# Altium PCB SMU_V2.03.PcbDoc (part 1 of 2)
Units mil, origin at the board's own origin, x right, y up, seen from the top; angles counter-clockwise.
Board outline 8661.42 x 7437.01 mil, 4 copper layers (Component Side, Ground Plane, Power Plane, Solder Side), stack 33.234 mil thick; 228 components, 152 nets, 762 pads, 943 vias.
Unrouted connection lines stored in the file: 21.
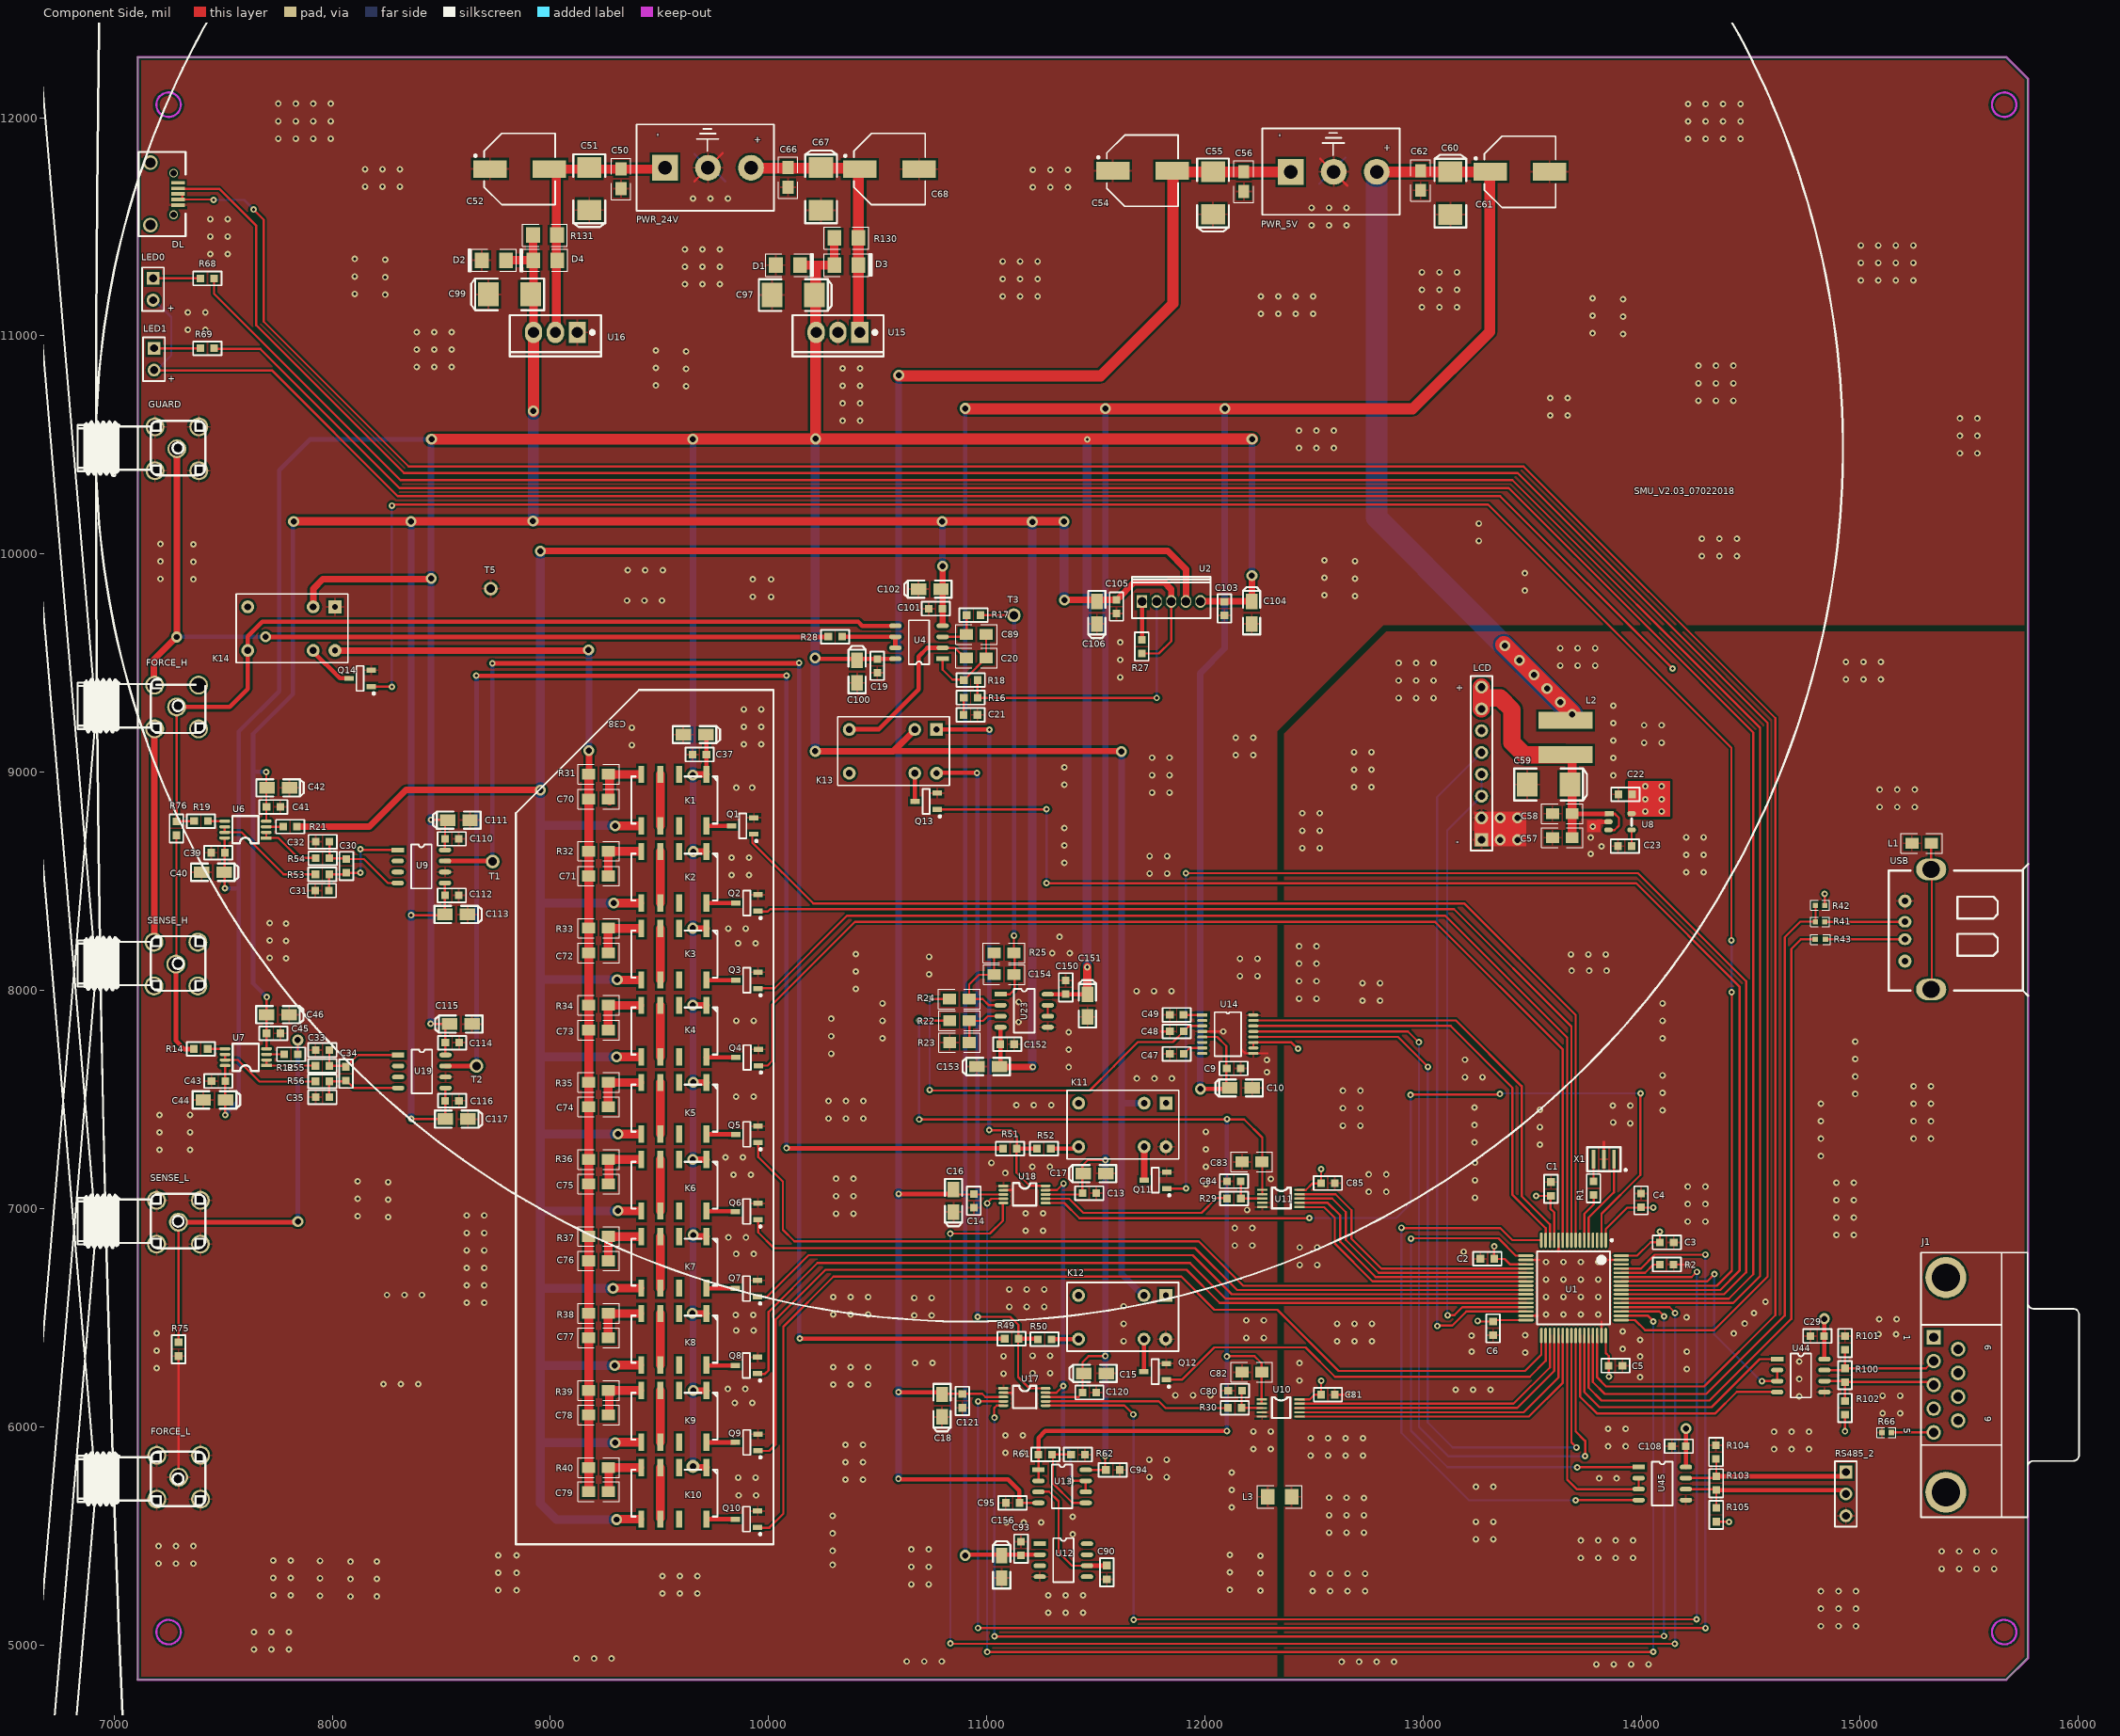
[diagram p0: Component Side view]
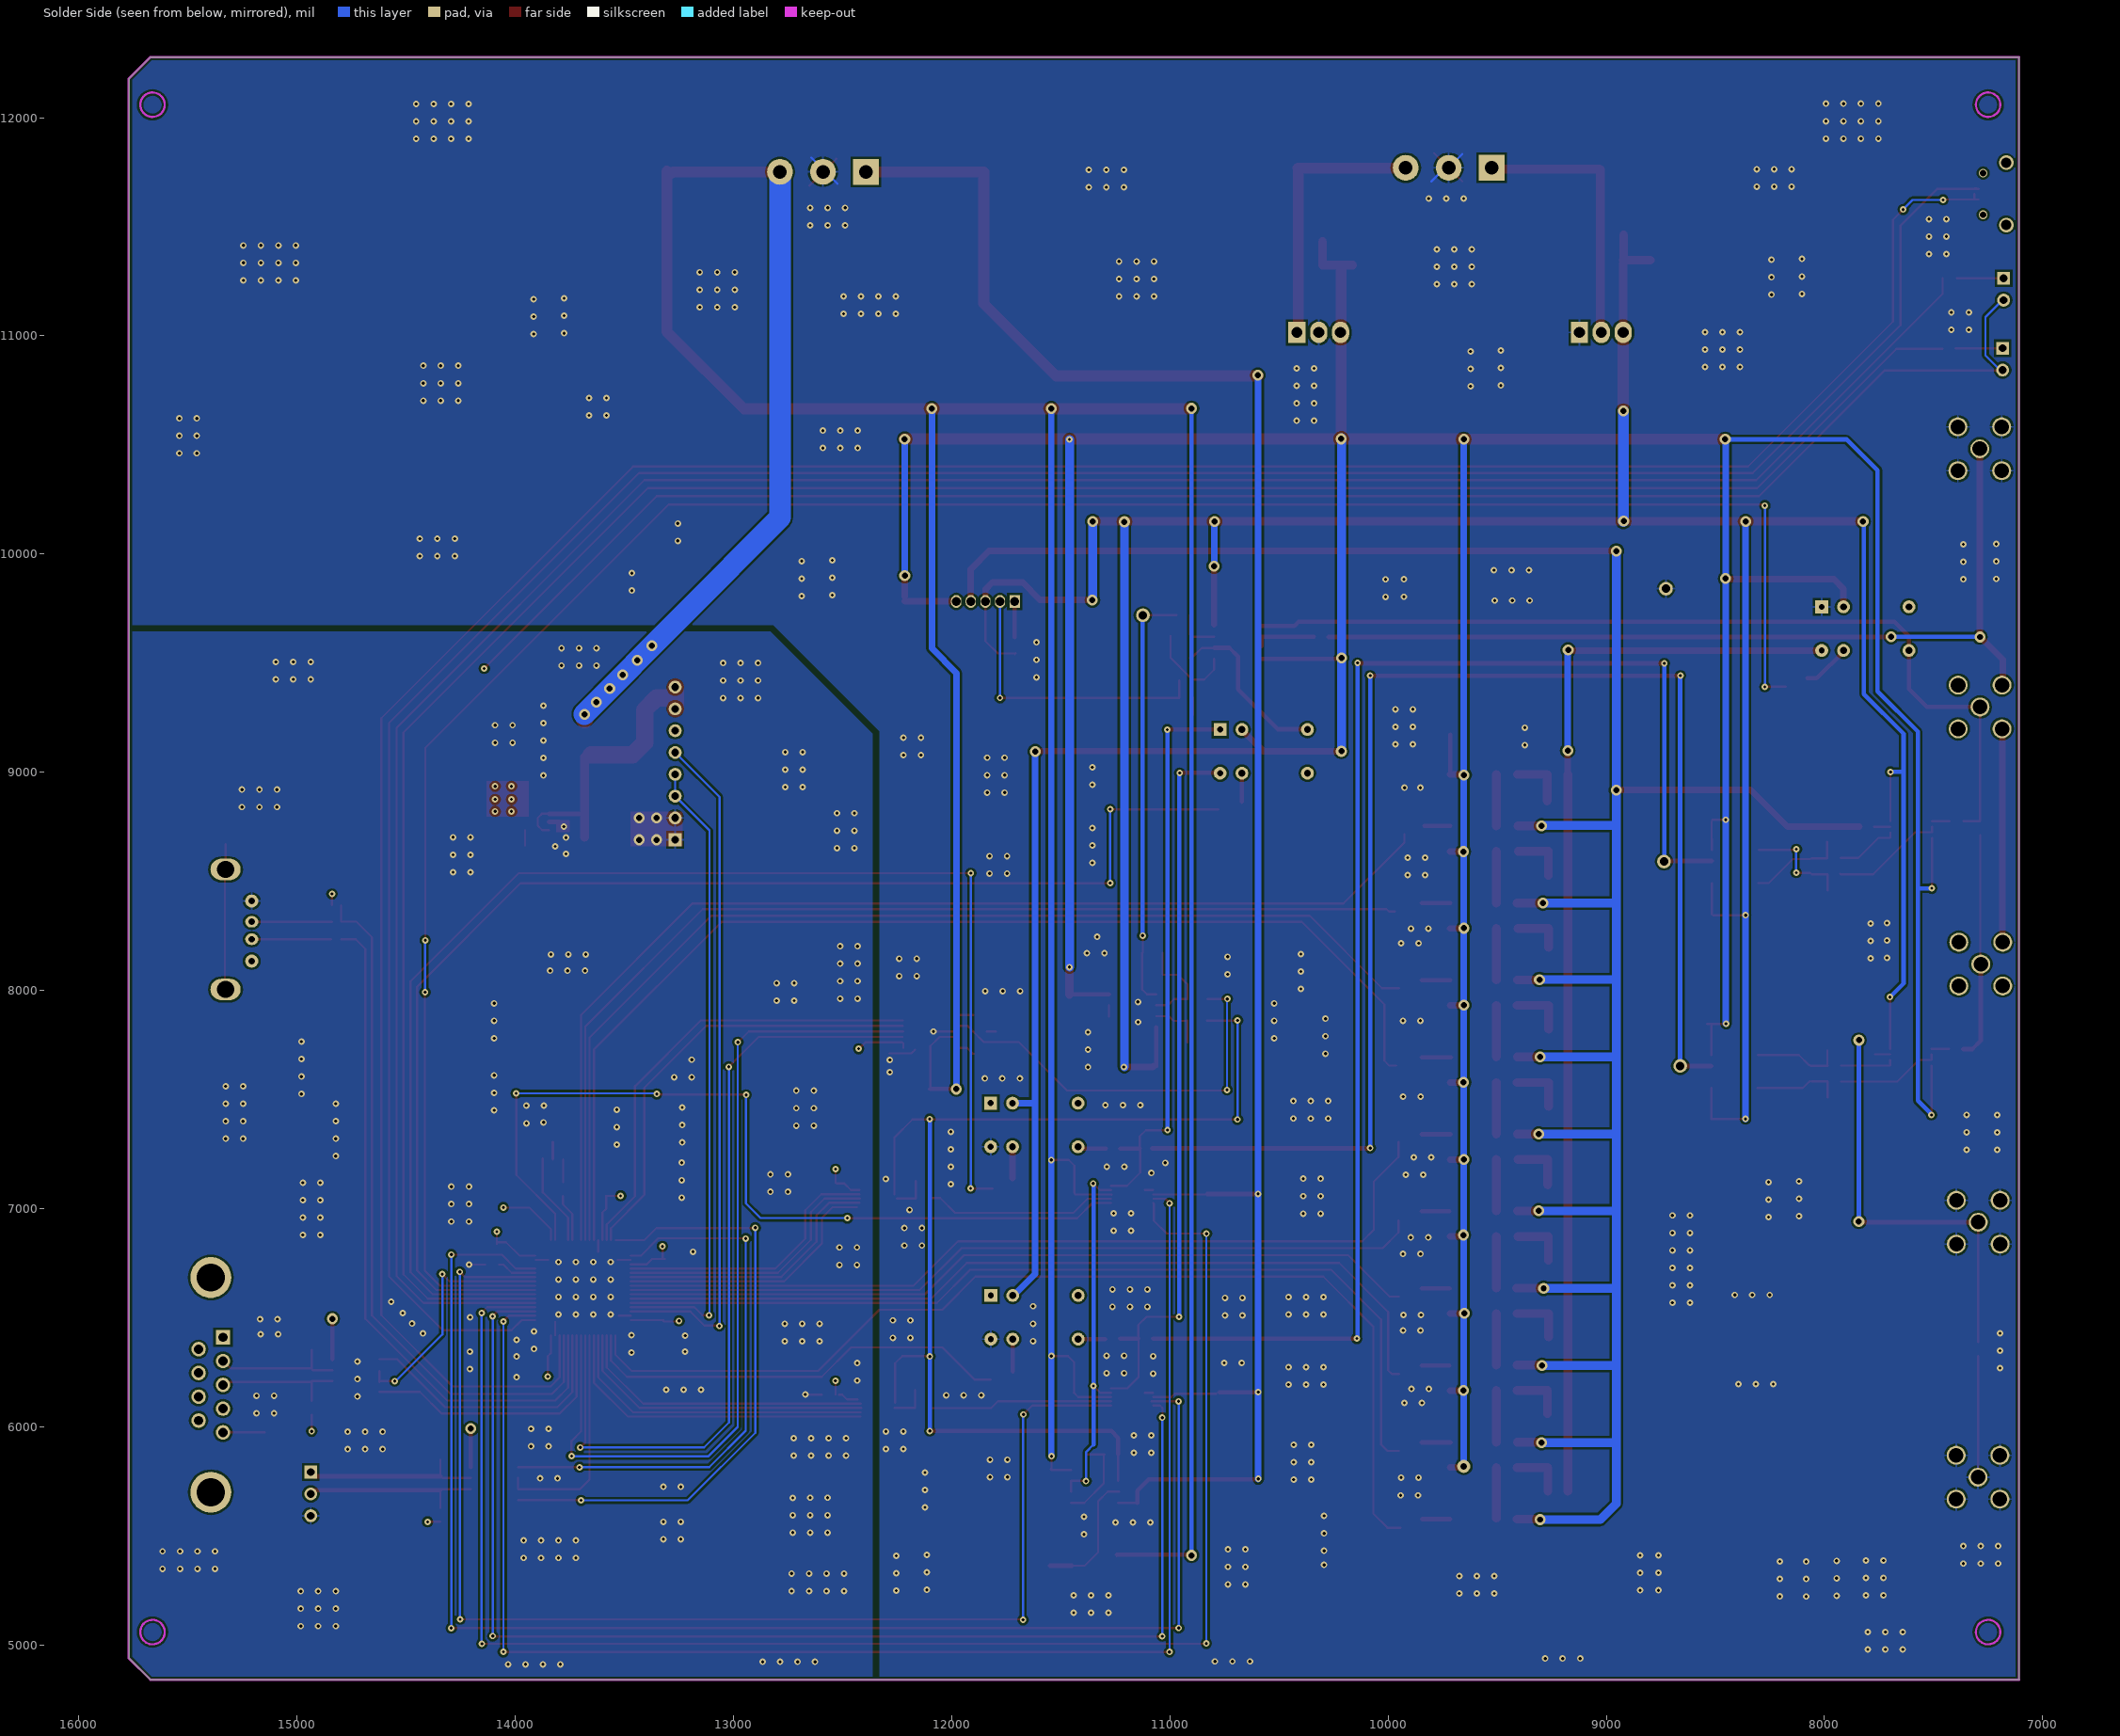
[diagram p1: Solder Side view, seen from below]
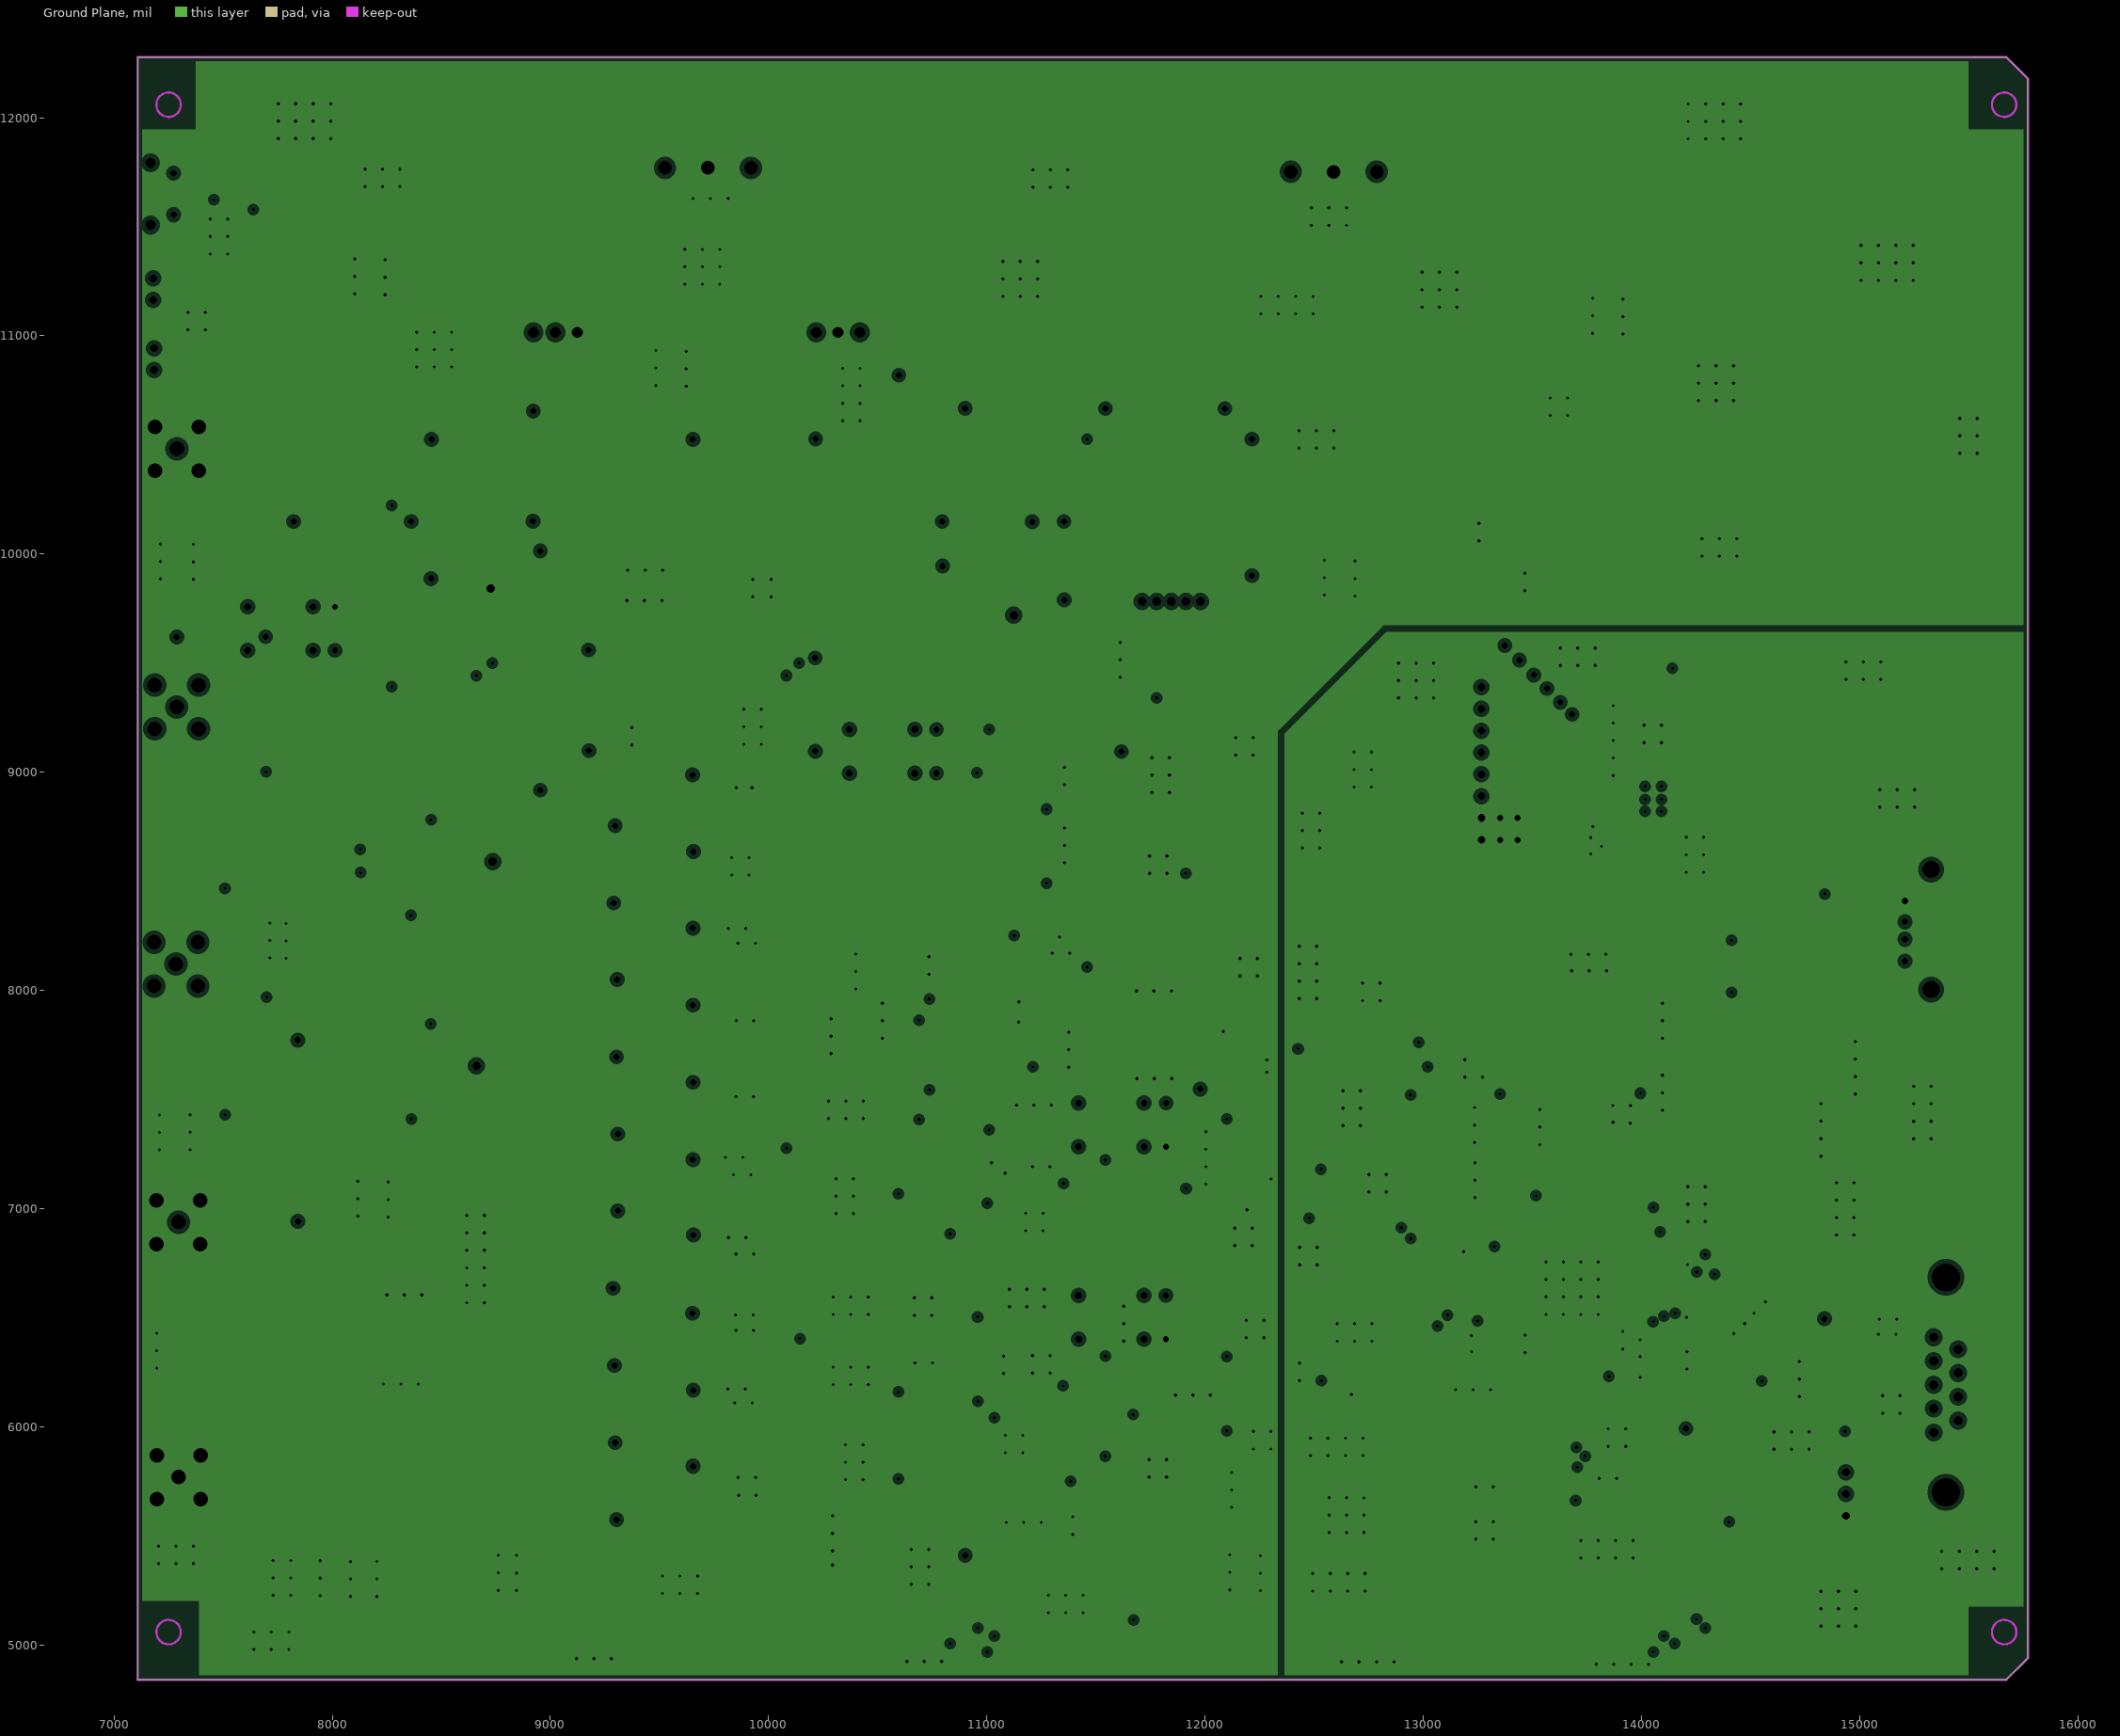
[diagram p2: Ground Plane, clearances drawn from the general rule]
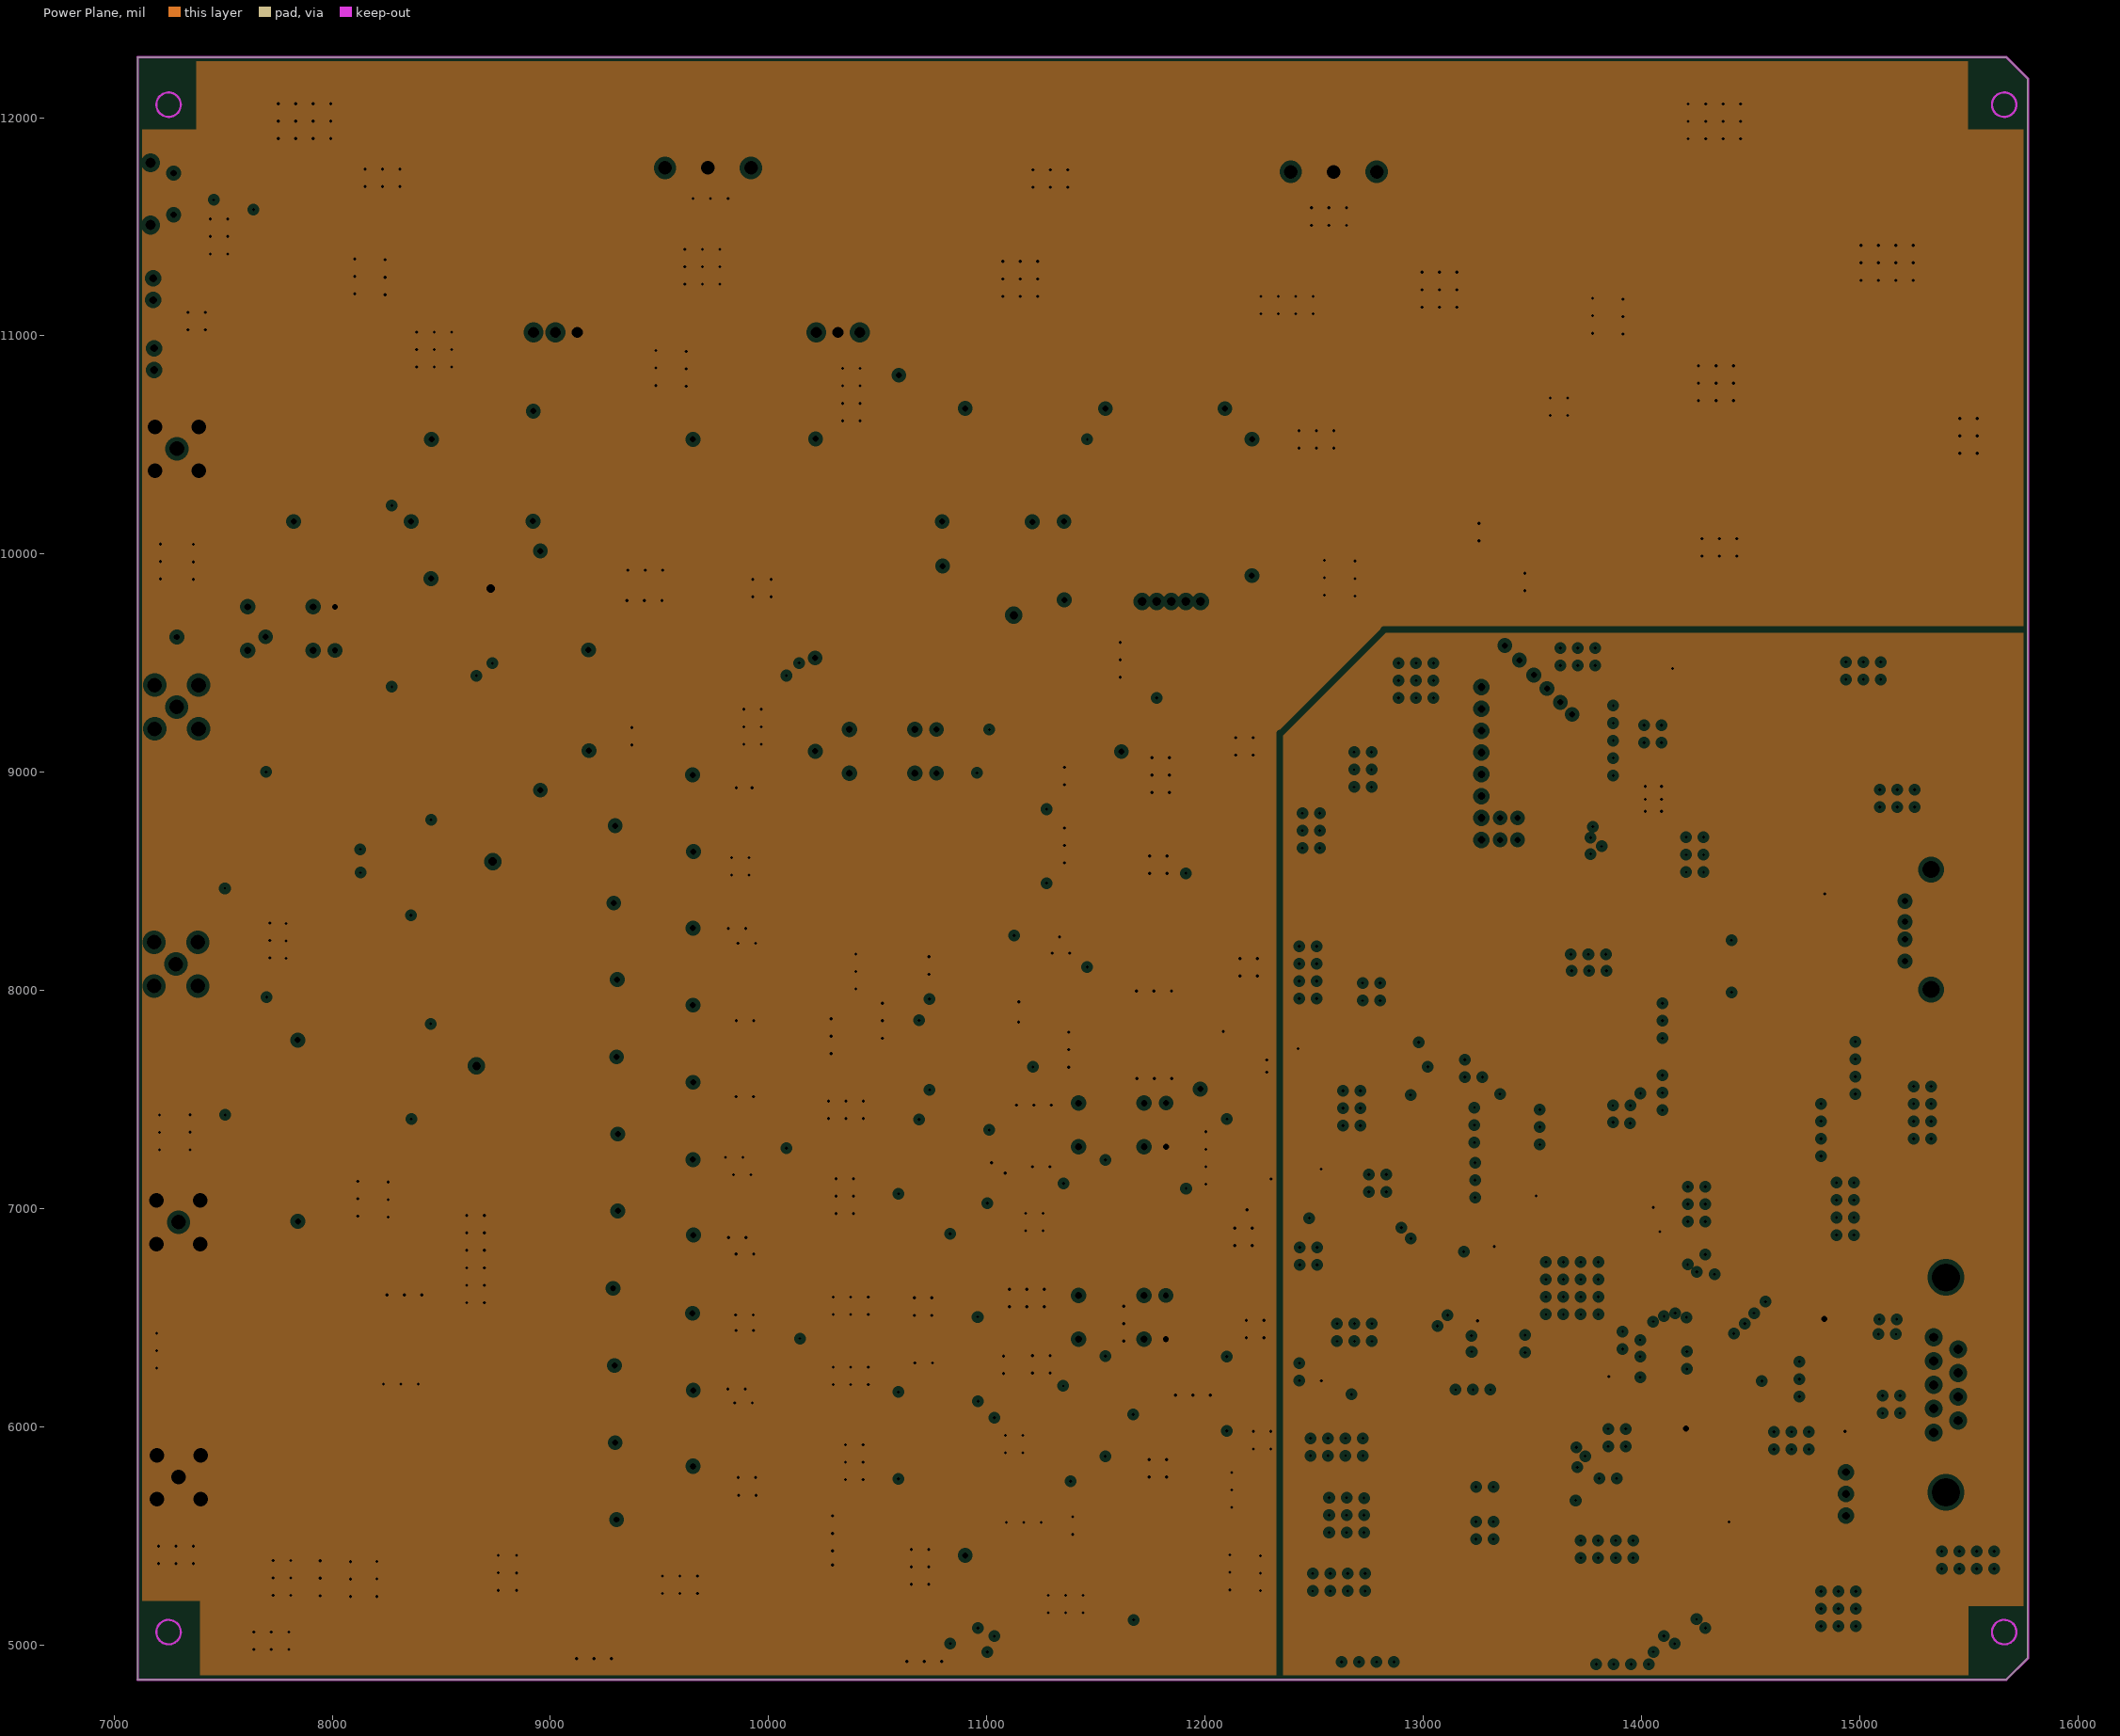
[diagram p3: Power Plane, clearances drawn from the general rule]

## Layer stack, top to bottom
Top Solder: solder mask 0.4, Solder Resist, Dk 3.5
Component Side: signal copper 1.4
Dielectric 1: core 12.6, FR-4, Dk 4.8
Ground Plane: plane copper 1.417, net AGND
Dielectric 3: prepreg 5, Dk 4.2
Power Plane: plane copper 1.417, net AGND
Dielectric 4: core 10, Dk 4.2
Solder Side: signal copper 1.4
Bottom Solder: solder mask 0.4, Solder Resist, Dk 3.5

## Board outline
7108.64,4840.98 15671.64,4840.98 15770.06,4939.41 15770.06,12179.56 15671.64,12277.99 7108.64,12277.99

## Design rules (kind name [scope] priority, off if disabled: settings)
Clearance [All] p1: gap=10
ComponentClearance [All] p1: gap=0 collisioncheckmode=3 verticalgap=0 showdistances=FALSE
MinimumSolderMaskSliver [All] p1: minsoldermaskwidth=0
PlaneClearance [All] p1: clearance=20
PlaneConnect PlaneConnect_GROUND [All] p1: planeconnectstyle=Relief reliefexpansion=20 reliefentries=4 reliefconductorwidth=10 reliefairgap=10
PlaneConnect "PlaneConnect _POWER" [All] p2: planeconnectstyle=Relief reliefexpansion=20 reliefentries=4 reliefconductorwidth=10 reliefairgap=10
PolygonConnect [IsVia] p1: connectstyle=Direct reliefconductorwidth=10 reliefentries=4 polygonreliefangle="90 Angle" airgapwidth=10
PolygonConnect PolygonConnect_1 [InNet('DGND')] p2: connectstyle=Relief reliefconductorwidth=10 reliefentries=4 polygonreliefangle="90 Angle" airgapwidth=10
PolygonConnect PolygonConnect_2 [InNet('AGND')] p3: connectstyle=Relief reliefconductorwidth=10 reliefentries=4 polygonreliefangle="90 Angle" airgapwidth=10
RoutingVias [All] p1: holewidth=28 width=50 viastyle="Through Hole" minholewidth=28 minwidth=50 maxholewidth=28 maxwidth=50
SilkToSilkClearance [All] p1: silktosilkclearance=0
SilkToSolderMaskClearance [IsPad] p1: minsilkscreentomaskgap=0 clearancetoexposedcopper=TRUE
SolderMaskExpansion [All] p1: expansion=4
UnpouredPolygon UnpouredPolygon_1 [All] p1:
Width [All] p1: maxlimit=100 minlimit=10 preferedwidth=10
23 further rules are at their usual default settings.

## Classes and differential pairs
component class Analog: C1 C2 C3 C4 C5 C6 C9 C10 C13 C14 C15 C16 C17 C18 C19 C20 C21 C22 C23 C29 C30 C31 C32 C33 C34 C35 C37 C38 C39 C40 C41 C42 C43 C44 C45 C46 C47 C48 C49 C57 C58 C59 C70 C71 C72 C73 C74 C75 C76 C77 C78 C79 C80 C81 C82 C83 C84 C85 C89 C90 C93 C94 C95 C100 C101 C102 C103 C104 C105 C106 C108 C110 C111 C112 C113 C114 C115 C116 C117 C120 C121 C150 C151 C152 C153 C154 C156 DL FORCE_H FORCE_L GUARD J1 K1 K2 K3 K4 K5 K6 K7 K8 K9 K10 K11 K12 K13 K14 L1 L3 LCD LED0 LED1 Q1 Q2 Q3 Q4 Q5 Q6 Q7 Q8 Q9 Q10 Q11 Q12 Q13 Q14 R1 R2 R12 R14 R16 R17 R18 R19 R21 R22 R23 R24 R25 R27 R28 R29 R30 R31 R32 R33 R34 R35 R36 R37 R38 R39 R40 R41 R42 R43 R49 R50 R51 R52 R53 R54 R55 R56 R61 R62 R66 R68 R69 R75 R76 R100 R101 R102 R103 R104 R105 RS485_2 SENSE_H SENSE_L T1 T2 T3 T5 U1 U2 U4 U6 U7 U8 U9 U10 U11 U12 U13 U14 U17 U18 U19 U23 U44 U45 USB X1
component class Power: C50 C51 C52 C54 C55 C56 C60 C61 C62 C66 C67 C68 C97 C99 D1 D2 D3 D4 L2 PWR_5V PWR_24V R130 R131 U15 U16

## Components (designator, comment, footprint, x,y, rotation, side; value= is the part's Value field where it differs from the comment)
C1 "100nF" 0603 13589.08,7029.23 r180 top
C2 "100nF" 0603 13354.54,6774.4 r270 top
C3 "100nF" 0603 14054.9,6841.07 r90 top
C4 "100nF" 0603 14002.08,6976.77 r180 top
C5 "100nF" 0603 13819.8,6275.9 r90 top
C6 "1uF" 0603 13315.34,6512.26 r0 top
C9 "100nF" 0603 12069.94,7638.31 r90 top
C10 "10uF" 3216 12164.23,7554.28 r180 top
C13 "100nF" 0603 11408.31,7066.39 r90 top
C14 "100nF" 0603 10935.98,7096.94 r0 top
C15 "10uF" 3216 11495.7,6246.01 r180 top
C16 "10uF" 3216 10846.02,7036.04 r270 top
C17 "10uF" 3216 11493.6,7161.75 r180 top
C18 "10uF" 3216 10793.17,6096.68 r270 top
C19 "100nF" 0603 10493.58,9548.72 r0 top
C20 "10uF" 0805#1 10996.9,9524.23 r180 top
C21 "3.3nF" 0603 10986.44,9267.15 r270 top
C22 "1uF" 0603 13987.23,8902.48 r270 top
C23 "22nF" 0603 13985.05,8665.49 r270 top
C29 "100nF" 0603 14866.88,6420.31 r270 top
C30 "10nF" 0603 8060.56,8631.62 r0 top
C31 "1nF" 0603 8014.19,8461.69 r270 top
C32 "1nF" 0603 7894.57,8677.33 r90 top
C33 "1nF" 0603 8016.13,7731 r270 top
C34 "10nF" 0603 8067.04,7557.12 r180 top
C35 "1nF" 0603 7893.81,7506.58 r90 top
C37 "100nF" 0603 9744.42,9085.04 r270 top
C38 "10uF" 3216 9660.12,9171.04 r0 top
C39 "100nF" 0603 7538.54,8635.17 r270 top
C40 "10uF" 3216 7452.8,8540.24 r0 top
C41 "100nF" 0603 7668.84,8836.88 r90 top
C42 "10uF" 3216 7752.06,8927.02 r0 top
C43 "100nF" 0603 7539.14,7588.69 r270 top
C44 "10uF" 3216 7460.34,7496.59 r0 top
C45 "100nF" 0603 7669.03,7798.64 r90 top
C46 "10uF" 3216 7750.64,7887.29 r0 top
C47 "100nF" 0603 11808.82,7704.57 r90 top
C48 "100nF" 0603 11808.73,7807.87 r90 top
C49 "100nF" 0603 11808.57,7883.63 r90 top
C50 "100nF" 0805#1 9323.53,11674.48 r90 top
C51 "10uF" 6032_POL 9179.33,11676.39 r270 top
C52 "47uF" cap_pol_8*10.2#1 8858.53,11764.48 r0 top
C54 "47uF,50V" cap_pol_8*10.2#1 11712.82,11756.73 r0 top
C55 "10uF" 6032_POL 12037.82,11656.73 r270 top
C56 "1uF" 0805#1 12177.82,11751.73 r270 top
C57 "100nF" 0805#1 13681.88,8700.31 r180 top
C58 "1uF" 0805#1 13681.88,8810.31 r180 top
C59 "10uF" 6032_POL 13571.88,8945.31 r0 top
C60 "10uF" 6032_POL 13122.82,11651.73 r90 top
C61 "47uF,50V" cap_pol_8*10.2#1 13442.82,11751.73 r0 top
C62 "1uF" 0805#1 12987.82,11756.73 r270 top
C66 "100nF" 0805#1 10088.88,11680.76 r90 top
C67 "10uF" 6032_pol 10238.3,11670.99 r90 top
C68 "47uF" cap_pol_8*10.2#2 10553.42,11764.23 r90 top
C70 "10uF" 0805#2 9178.42,8902.04 r180 top
C71 "1uF" 0805#2 9178.42,8549.31 r180 top
C72 "100nF" 0805#2 9178.42,8196.58 r180 top
C73 "10nF" 0805#2 9178.42,7843.86 r180 top
C74 "1nF" 0805#2 9178.42,7491.13 r180 top
C75 "100pF" 0805#2 9178.42,7138.4 r180 top
C76 "10pF" 0805#2 9178.42,6785.67 r180 top
C77 "1pF" 0805#1 9265.42,6407.94 r180 top
C78 "NULL" 0805#2 9178.42,6080.22 r180 top
C79 "NULL" 0805#2 9178.42,5727.49 r180 top
C80 "22nF" 0603 12076.14,6161.19 r90 top
C81 "100nF" 0603 12501.95,6142.99 r90 top
C82 "10uF" 0805#1 12169.56,6250.05 r0 top
C83 "10uF" 0805#1 12169.4,7213.94 r0 top
C84 "22nF" 0603 12193.27,7129.86 r270 top
C85 "100nF" 0603 12501.73,7112.73 r90 top
C89 "10uF" 0805#1 10996.65,9631.77 r180 top
C90 "100nF" 0603 11545.5,5394.14 r0 top
C93 "100nF" 0603 11152.4,5503.07 r0 top
C94 "100nF" 0603 11515.8,5798.09 r90 top
C95 "100nF" 0603 11179.11,5655.49 r270 top
C97 "4.7uF" 6032_pol 10110.36,11188.68 r0 top
C99 "4.7uF" 6032_pol 8814.93,11188.34 r180 top
C100 "10uF" 3216 10406.68,9461.22 r90 top
C101 "100nF" 0603 10826.59,9753.75 r270 top
C102 "10uF" 3216 10738.18,9840.19 r180 top
C103 "100nF" 0603 12084.43,9811.61 r0 top
C104 "10uF" 3216 12214.71,9731.16 r90 top
C105 "100nF" 0603 11589.52,9820.24 r0 top
C106 "10uF" 3216 11502.74,9731.21 r270 top
C108 "100nF" 0603 14231.88,5915.31 r270 top
C110 "100nF" 0603 8486.92,8690.42 r90 top
C111 "10uF" 3216 8579.73,8781.77 r180 top
C112 "100nF" 0603 8486.73,8431.51 r90 top
C113 "10uF" 3216 8568.25,8346.72 r0 top
C114 "100nF" 0603 8488.42,7756.15 r90 top
C115 "10uF" 3216 8589.03,7846.89 r180 top
C116 "100nF" 0603 8488.06,7490.29 r90 top
C117 "10uF" 3216 8570.25,7408.93 r0 top
C120 "100nF" 0603 11408.85,6152.82 r90 top
C121 "100nF" 0603 10883.35,6179.79 r0 top
C150 "100nF" 0603 11365.84,7952.81 r180 top
C151 "10uF" 3216 11462.29,7930.18 r90 top
C152 "100nF" 0603 11032.3,7749.28 r90 top
C153 "10uF" 3216 11005.73,7652.33 r180 top
C154 "100pF" 0805#1 11124.08,8072.24 r180 top
C156 "10uF" 3216 11068.92,5358.56 r90 top
D1 "1N4007" 1N4007_M7 10085.74,11310.46 r0 top
D2 "1N4007" 1N4007_M7 8742.68,11359.59 r180 top
D3 "Diode 1N4007" 1N4007_M7 10353.38,11310.75 r0 top
D4 "Diode 1N4007" 1N4007_M7 8979.22,11359.85 r180 top
DL "USB_5pin" USBmicro_B 7187.76,11640.95 r90 top
FORCE_H "SMB" SMA 7186.47,9399.39 r0 top
FORCE_L "SMB" SMA 7195.73,5869.31 r0 top
GUARD "SMB" SMA 7187.68,10582.57 r0 top
J1 "USART" DSUB1.385-2H9 15768.88,6192.26 r270 top
K1 "AXICOM IM" AXICOM_IM06 9590.6,8865 r180 top
K2 "AXICOM IM" AXICOM_IM06 9590.6,8512.03 r180 top
K3 "AXICOM IM" AXICOM_IM06 9590.6,8159.06 r180 top
K4 "AXICOM IM" AXICOM_IM06 9590.6,7806.09 r180 top
K5 "AXICOM IM" AXICOM_IM06 9590.6,7453.12 r180 top
K6 "AXICOM IM" AXICOM_IM06 9590.6,7100.15 r180 top
K7 "AXICOM IM" AXICOM_IM06 9590.6,6747.18 r180 top
K8 "AXICOM IM" AXICOM_IM06 9590.6,6394.2 r180 top
K9 "AXICOM IM" AXICOM_IM06 9590.6,6041.23 r180 top
K10 "AXICOM IM" AXICOM_IM06 9590.6,5688.26 r180 top
K11 "Relay" Relay_OMRON5V 11820.71,7483.31 r270 top
K12 "Relay" Relay_OMRON5V 11820.02,6601.89 r270 top
K13 "Relay" Relay_OMRON5V 10769.38,9195.48 r270 top
K14 "Relay" Relay_OMRON5V 8012.65,9757.88 r270 top
L1 "10uH" 0805#1 15239.13,8674.36 r0 top
L2 "10uH" 8040 13651.88,9080.31 r0 top
L3 "10uH" 1206 12286.48,5679.69 r0 top
LCD "Header 8" HDR1X8 13266.88,8690.31 r90 top
LED0 "Header 2" HDR1X2 7178.74,11263.53 r270 top
LED1 "Header 2" HDR1X2 7183.34,10943.04 r270 top
PWR_5V "Header 3" PWR_3T 12392.82,11751.73 r90 top
PWR_24V "Header 3" PWR_3T 9525.2,11770.04 r90 top
Q1 "NUD3112" SOT23 9880.08,8755.64 r180 top
Q2 "NUD3112" SOT23 9898.81,8402.9 r180 top
Q3 "NUD3112" SOT23 9898.76,8048.15 r180 top
Q4 "NUD3112" SOT23 9900.32,7694.51 r180 top
Q5 "NUD3112" SOT23 9898.73,7342.46 r180 top
Q6 "NUD3112" SOT23 9898.27,6988.86 r180 top
Q7 "NUD3112" SOT23 9897.23,6635.72 r180 top
Q8 "NUD3112" SOT23 9896.63,6283.29 r180 top
Q9 "NUD3112" SOT23 9898.33,5930.65 r180 top
Q10 "NUD3112" SOT23 9897.36,5578.86 r180 top
Q11 "NUD3112" SOT23 11771.55,7131.89 r180 top
Q12 "NUD3112" SOT23 11769.84,6254.92 r180 top
Q13 "NUD3112" SOT23 10720.58,8868.65 r180 top
Q14 "NUD3112" SOT23 8126.7,9431.92 r180 top
R1 "100R" 0603 13784.37,7032.11 r180 top
R2 "10K" 0603 14177.23,6748 r270 top
R12 "33R" 0603 7750.05,7703.02 r90 top
R14 "33R" 0603 7458.9,7736.07 r270 top
R16 "100K" 0603 10864.23,9337.68 r90 top
R17 "1K，0.1%" 0603 10999.92,9724.38 r270 top
R18 "1K" 0603 10986.99,9426.52 r270 top
R19 "33R" 0603 7336.8,8771.64 r90 top
R21 "33R" 0603 7867.95,8754.96 r270 top
R22 "5.1K" 0805#1 10919.65,7860.77 r180 top
R23 "5.1K" 0805#1 10919.43,7761.25 r180 top
R24 "5.1K" 0805#1 10918.57,7960.42 r180 top
R25 "5.1K" 0805#1 11123.61,8172.08 r180 top
R27 "100R" 0603 11705.47,9636.6 r0 top
R28 "1K" 0603 10243.49,9616.95 r90 top
R29 "1K" 0603 12194.06,7050.57 r270 top
R30 "1K" 0603 12197.2,6091.12 r270 top
R31 "1R" 0805#2 9178.42,9016.57 r180 top
R32 "10R" 0805#2 9178.42,8663.41 r180 top
R33 "100R" 0805#2 9178.42,8310.25 r180 top
R34 "1K" 0805#1 9265.42,7932.09 r180 top
R35 "10K" 0805#1 9265.42,7578.92 r180 top
R36 "100K" 0805#1 9265.42,7225.76 r180 top
R37 "1M" 0805#1 9265.42,6872.6 r180 top
R38 "10M" 0805#2 9178.42,6544.44 r180 top
R39 "100M" 0805#2 9178.42,6191.28 r180 top
R40 "1G" 0805#2 9178.42,5838.12 r180 top
R41 "22R" 0402#1 14711.48,8310.31 r90 top
R42 "1.5K" 0402#1 14711.48,8385.9 r90 top
R43 "22R" 0402#2 14715.42,8230.07 r90 top
R49 "10K" 0603 11052.22,6399.41 r90 top
R50 "1K" 0603 11203.33,6397.12 r90 top
R51 "10K" 0603 11044.81,7270.38 r90 top
R52 "1K" 0603 11200.43,7270.38 r90 top
R53 "2.2K,0.1%" 0603 7893.16,8527.65 r90 top
R54 "2.2K,0.1%" 0603 7894.7,8601.33 r90 top
R55 "2.2K,0.1%" 0603 8015.79,7658.53 r270 top
R56 "2.2K,0.1%" 0603 8015.79,7587.28 r270 top
R61 "10K, 0.1%" 0603 11329.03,5877.26 r270 top
R62 "10K, 0.1%" 0603 11478.46,5876.77 r270 top
R66 "0R" 0402#1 15229.34,5977.95 r270 top
R68 "510R" 0603 7488.27,11267.46 r270 top
R69 "510R" 0603 7488.27,10947.16 r270 top
R75 "100R，0.1%" 0603 7299.63,6294.45 r180 top
R76 "100R，0.1%" 0603 7290.15,8681.28 r180 top
R100 "NULL" 0603 14936.88,6175.31 r180 top
R101 "NULL" 0603 14928.38,6445.31 r0 top
R102 "NULL" 0603 14936.88,6025.31 r180 top
R103 "NULL" 0603 14346.88,5680.31 r180 top
R104 "NULL" 0603 14336.88,5945.31 r0 top
R105 "NULL" 0603 14346.88,5535.31 r180 top
R130 "0R" 1206 10410.97,11448.55 r180 top
R131 "0R" 1206 9030.29,11461.48 r180 top
RS485_2 "Header 3" HDR1X3 14936.81,5792.26 r270 top
SENSE_H "SMB" SMA 7183.17,8220.98 r0 top
SENSE_L "SMB" SMA 7194.97,7038 r0 top
T1 "TestPoint" TestPoint 8735.21,8590.83 r0 top
T2 "TestPoint" TestPoint 8661.05,7653.87 r0 top
T3 "TestPoint" TestPoint 11123.5,9719.33 r0 top
T5 "TestPoint" TestPoint 8726.33,9841.28 r0 top
U1 "STM32F103RET6" LQFP64_N 13681.88,6635.31 r90 top
U2 "BUF634" PSFM-T5 11711.2,9782.7 r90 top
U4 "AD4522-2" SO-8N#1 10639.18,9649.78 r180 top
U6 "ADA4610-2" MSO-8 7669.49,8687.92 r180 top
U7 "ADA4610-2" MSO-8 7670.5,7644.66 r180 top
U8 "RT9193" SOT-23-5 13895.71,8771.26 r270 top
U9 "AD8422ARZ" SO-8N#2 8300.1,8643.45 r0 top
U10 "AD7988-1" MSOP10 12355.83,6053.59 r0 top
U11 "AD7988-1" MSOP10 12357.02,7013.81 r0 top
U12 "ADR441" SO-8N#1 11400.39,5334.06 r0 top
U13 "AD8676" SO-8N#2 11236.52,5802.52 r0 top
U14 "AD5689R" TSSOP16 11988.04,7888.42 r0 top
U15 "7815" TO-220 10316.64,11015.51 r180 top
U16 "7915" TO-220 9021.53,11015.51 r180 top
U17 "AD8253" RM-10 11076.17,6175.99 r0 top
U18 "AD8253" RM-10 11076.17,7104.38 r0 top
U19 "AD8422ARZ" SO-8N#2 8302.18,7703.91 r0 top
U23 "AD8676" SO-8N#2 11062.71,7982.31 r0 top
U44 "SP3485" SO-8N#2 14621.88,6310.31 r0 top
U45 "SP3485" SO-8N#2 13986.88,5815.31 r0 top
USB "USB" USB_A 15415.03,8315.31 r0 top
X1 "8M smd" 8Mhz_XTAL 13874.68,7226 r180 top

## Footprints (in the part's own frame and the unit in brackets; to place one, negate y for a bottom-side part, rotate by r counter-clockwise, add the part's x,y. Pads: shape width x height; smd on the part's side, far side on the other; paste and mask are expansions set on the pad)
1N4007_M7 [mm]
  rect 1.6x1.8 smd: 1(-1.34,0.34) 2(1.46,0.34)
  silkscreen extent -2.54,-0.96 2.99,1.64
8Mhz_XTAL [mm]
  rect 0.4x2.2 smd: 1(0,0) 2(1.2,0) 3(2.4,0)
  silkscreen extent -1.45,-1.39 3.13,1.4
0402#1 [mil]
  rect 25x25 smd: 1(3.98,-127.99) 2(3.98,-84.98)
  silkscreen extent -19,-150 26,-63
0402#2 [mil]
  rect 25x25 smd: 1(4.06,-127.99) 2(4.06,-80.75)
  silkscreen extent -19,-150 26,-59
0603 [mil]
  rect 35x35 smd: 1(4.25,-92.76) 2(4.25,-29.76)
  silkscreen extent -27,-126 36,4
0805#1 [mil]
  rect 60x50 smd: 1(90,0) 2(0,0)
  silkscreen extent -50,-45 140,45
0805#2 [mil]
  rect 60x50 smd: 1(3,25) 2(-87,25)
  silkscreen extent -137,-20 53,70
1206 [mm]
  rect 1.6x1.8 smd: 1(0,0) 2(2.8,0)
  silkscreen extent -1.2,-1.3 4,1.3
3216 [mm]
  rect 1.8x1.35 smd: 1(1.312,0.032) 2(-1.308,0.032)
  silkscreen extent -2.54,-0.97 2.97,1.03, body extent -1.7,-0.81 1.7,0.87, height 1.71
6032_POL [mm]
  rect 2.4x2.8 smd: 1(2.538,-0.041) 2(-2.422,-0.041)
  silkscreen extent -3.95,-1.89 4.53,1.81
6032_pol [mm]
  rect 2.4x2.8 smd: 1(2.538,-0.041) 2(-2.422,-0.041)
  silkscreen extent -3.95,-1.89 4.53,1.81
8040 [mm]
  rect 6.3x2 smd: 1(0,4) 2(0,0)
AXICOM_IM06 [mm]
  rect 0.7x2 smd: 1(-3.174,-3.174) 2(0.026,-3.174) 3(2.226,-3.174) 4(4.426,-3.174) 5(4.426,2.826) 6(2.226,2.826) 7(0.026,2.826) 8(-3.174,2.826)
  silkscreen extent -4.44,-2.92 5.59,2.54
cap_pol_8*10.2#1 [mm]
  rect 3.9x2.05 smd: 1(-3.443,-0.001) 2(3.457,-0.001)
  silkscreen extent -5.27,-4.15 4.16,4.15
cap_pol_8*10.2#2 [mm]
  rect 2.05x3.9 smd: 1(-0.001,3.443) 1(-0.001,3.443) 2(-0.001,-3.457) 2(-0.001,-3.457)
  silkscreen extent -4.15,-4.16 4.15,5.27
DSUB1.385-2H9 [mm] "Connector; D Subminiature; 9 Position; Right Angle; Pitch 1.385 mm"
  rect 1.69x1.69 hole 1.09: 1(-5.54,-10.92)
  round 1.69 hole 1.09: 2(-2.77,-10.92) 3(0,-10.92) 4(2.77,-10.92) 5(5.54,-10.92) 6(-4.155,-8.08) 7(-1.385,-8.08) 8(1.385,-8.08) 9(4.155,-8.08)
  round 4.76 hole 3.26: 10(-12.495,-9.5) 11(12.495,-9.5)
  silkscreen extent -15.4,-12.4 15.4,6
HDR1X2 [mm] "Connector; Header; 2 Position"
  rect 1.5x1.5 hole 0.9: 1(0,0)
  round 1.5 hole 0.9: 2(2.54,0)
  silkscreen extent -1.27,-1.27 3.81,1.27
HDR1X3 [mm] "Connector; Header; 3 Position"
  rect 1.5x1.5 hole 0.9: 1(0,0)
  round 1.5 hole 0.9: 2(2.54,0) 3(5.08,0)
  silkscreen extent -1.27,-1.27 6.35,1.27
HDR1X8 [mm] "Connector; Header; 8 Position"
  rect 1.5x1.5 hole 0.9: 1(0,0)
  round 1.5 hole 0.9: 2(2.54,0) 3(5.08,0) 4(7.62,0) 5(10.16,0) 6(12.7,0) 7(15.24,0) 8(17.78,0)
  silkscreen extent -1.27,-1.27 19.05,1.27
LQFP64_N [mm]
  oval 1.8x0.3 smd: 1(5.586,-3.921) 2(5.586,-3.421) 3(5.586,-2.921) 4(5.586,-2.421) 5(5.586,-1.921) 6(5.586,-1.421) 7(5.586,-0.921) 8(5.586,-0.421) 9(5.586,0.079) 10(5.586,0.579) 11(5.586,1.079) 12(5.586,1.579) 13(5.586,2.079) 14(5.586,2.579) 15(5.586,3.079) 16(5.586,3.579) 33(-5.514,3.579) 34(-5.514,3.079) 35(-5.514,2.579) 36(-5.514,2.079) 37(-5.514,1.579) 38(-5.514,1.079) 39(-5.514,0.579) 40(-5.514,0.079) 41(-5.514,-0.421) 42(-5.514,-0.921) 43(-5.514,-1.421) 44(-5.514,-1.921) 45(-5.514,-2.421) 46(-5.514,-2.921) 47(-5.514,-3.421) 48(-5.514,-3.921)
  oval 0.3x1.8 smd: 17(3.786,5.379) 18(3.286,5.379) 19(2.786,5.379) 20(2.286,5.379) 21(1.786,5.379) 22(1.286,5.379) 23(0.786,5.379) 24(0.286,5.379) 25(-0.214,5.379) 26(-0.714,5.379) 27(-1.214,5.379) 28(-1.714,5.379) 29(-2.214,5.379) 30(-2.714,5.379) 31(-3.214,5.379) 32(-3.714,5.379) 49(-3.714,-5.721) 50(-3.214,-5.721) 51(-2.714,-5.721) 52(-2.214,-5.721) 53(-1.714,-5.721) 54(-1.214,-5.721) 55(-0.714,-5.721) 56(-0.214,-5.721) 57(0.286,-5.721) 58(0.786,-5.721) 59(1.286,-5.721) 60(1.786,-5.721) 61(2.286,-5.721) 62(2.786,-5.721) 63(3.286,-5.721) 64(3.786,-5.721)
  silkscreen extent -4.21,-4.75 5.71,4.08, body extent -4.96,-5.17 5.04,4.83, height 1.6
MSO-8 [mil]
  rect 50x15 smd: 1(-28,-11)
  oval 50x15 smd: 2(-28,-36.6) 3(-28,-62.2) 4(-28,-87.8) 5(162,-87.8) 6(162,-62.2) 7(162,-36.6) 8(162,-11)
  silkscreen extent 7,-111 127,14
MSOP10 [mm]
  rect 1.2x0.25 smd: 1(-2.413,1.829) 2(-2.413,1.329) 3(-2.413,0.829) 4(-2.413,0.329) 5(-2.413,-0.171) 6(1.937,-0.171) 7(1.937,0.329) 8(1.937,0.829) 9(1.937,1.329) 10(1.937,1.829)
  silkscreen extent -1.27,-0.33 0.89,2.08
PSFM-T5 [mm]
  rect 1.5x1.2 hole 1: 1(0,0)
  oval 1.5x1.2 hole 1: 2(0,-1.7) 3(0,-3.4) 4(0,-5.1) 5(0,-6.8)
  silkscreen extent -1.95,-7.98 2.87,1.16
PWR_3T [mm]
  rect 3x3 hole 1.6: 1(0,0)
  round 3 hole 1.6: 2(0,-5) 3(0,-10)
  silkscreen extent -5,-12.67 5.05,3.3
Relay_OMRON5V [mm]
  rect 1.5x1.5 hole 0.7: 1(0,0)
  round 1.5 hole 0.8: 2(0,-2.54) 3(0,-10.16) 4(5.08,-10.16) 5(5.08,-2.54)
  round 1.5 hole 0.7: 6(5.08,0)
  silkscreen extent -1.5,-11.5 6.5,1.5
RM-10 [mm]
  rect 1.143x0.33 smd: 1(0,0)
  oval 1.143x0.33 smd: 2(0,-0.5) 3(0,-1) 4(0,-1.5) 5(0,-2) 6(4.9,-2) 7(4.9,-1.5) 8(4.9,-1) 9(4.9,-0.5) 10(4.9,0)
  silkscreen extent 1.1,-2.31 3.81,0.32
SMA [mm]
  round 2.2 hole 1.7: 1(2.55,-2.55) 2(0,-5.1) 2(0,0) 2(5.1,-5.1) 2(5.1,0)
SO-8N#1 [mm]
  rect 1.44x0.55 smd: 1(-4.013,3.302)
  oval 1.44x0.55 smd: 2(-4.013,2.022) 3(-4.013,0.742) 4(-4.013,-0.538) 5(1.487,-0.538) 6(1.487,0.742) 7(1.487,2.022) 8(1.487,3.302)
  silkscreen extent -2.46,-1.18 -0.07,3.94
SO-8N#2 [mm]
  rect 1.44x0.55 smd: 1(0,0)
  oval 1.44x0.55 smd: 2(0,-1.28) 3(0,-2.56) 4(0,-3.84) 5(5.5,-3.84) 6(5.5,-2.56) 7(5.5,-1.28) 8(5.5,0)
  silkscreen extent 1.55,-4.48 3.95,0.64
SOT23 [mm]
  rect 1.1x0.6 smd: 1(-1.325,1.001) 2(-1.325,-0.899) 3(1.275,0.051)
  silkscreen extent -1.75,-1.4 0.4,1.93
SOT-23-5 [mm]
  rect 0.6x1 smd: 1(-0.995,-1.101)
  oval 0.6x1 smd: 2(-0.045,-1.201) 3(0.905,-1.201) 4(0.905,1.499) 5(-0.995,1.499)
  silkscreen extent -0.4,1.5 0.4,1.5, body extent -1.5,-1.3 1.4,1.5, height 1.2
TestPoint [mm]
  round 1.6 hole 1: 1(-0.002,-0.002)
TO-220 [mm]
  rect 2x2.5 hole 1.3: 1(-2.565,0)
  oval 2x2.5 hole 1.3: 2(-0.025,0) 3(2.515,0)
  silkscreen extent -5.33,-2 5.27,2.8, body extent -5.11,-1.45 5.05,2.9, height 19.6
TSSOP16 [mm]
  rect 1.2x0.36 smd: 1(-0.021,-0.024)
  oval 1.2x0.36 smd: 2(-0.021,-0.664) 3(-0.021,-1.304) 4(-0.021,-1.944) 5(-0.021,-2.584) 6(-0.021,-3.224) 7(-0.021,-3.864) 8(-0.021,-4.504) 9(5.919,-4.504) 10(5.919,-3.864) 11(5.919,-3.224) 12(5.919,-2.584) 13(5.919,-1.944) 14(5.919,-1.304) 15(5.919,-0.664) 16(5.919,-0.024)
  silkscreen extent 1.41,-4.82 4.48,0.3
USB_A [mil] "USB A type Connector"
  round 60 hole 30: 1(-207.63,-180.91) 4(-207.63,94.09)
  oval 60x52.13 hole 30: 2(-207.63,-80.91) 3(-207.63,-0.91)
  oval 137.79x98.42 hole 78.74: 5(-87.63,239.09) 6(-87.63,-310.91)
  silkscreen extent -282,-341 357,264
USBmicro_B [mm]
  rect 0.4x1.6 smd: 1(1.542,-2.679) 2(0.892,-2.679) 3(0.242,-2.679) 4(-0.408,-2.679) 5(-1.058,-2.679)
  silkscreen extent -4.67,-3.56 5.12,1.93

## Part data
C1 C2 C3 C4 C5 C6 C9 C13 C14 C19 C20 C21 C22 C23 C29 C30 C31 C32 C33 C34 C35 C37 C39 C41 C43 C45 C47 C48 C49 C50 C58 C66 C70 C71 C72 C73 C74 C75 C76 C77 C78 C79 C80 C82 C83 C84 C89 C90 C93 C94 C95 C101 C103 C105 C108 C110 C112 C114 C116 C120 C121 C150 C152 C154: library part Cap, "Capacitor"
C10 C15 C16 C17 C18 C38 C40 C42 C44 C46 C51 C52 C54 C55 C59 C60 C61 C67 C68 C97 C99 C100 C102 C104 C106 C111 C113 C115 C117 C151 C153 C156: library part "Cap Pol1", "Polarized Capacitor (Radial)"
C56 C57 C62 C81 C85: library part Cap, "Capacitor,100V"
D1 D2: library part "Diode 1N4007", "1 Amp General Purpose Rectifier"
D3 D4: "1 Amp General Purpose Rectifier"
FORCE_H FORCE_L GUARD SENSE_H SENSE_L: "SMB Straight Connector"
J1: library part "D Connector 9", "Receptacle Assembly, 9 Position, Right Angle"
K1 K2 K3 K4 K5 K6 K7 K8 K9 K10: library part "AXiCOM IM05"
K11 K12 K13 K14: library part Relay_OMRON5V, "Relay OMRON"
L1 L2 L3: library part Inductor, "Inductor"
LCD: "Header, 8-Pin"
LED0 LED1: "Header, 2-Pin"
PWR_5V PWR_24V RS485_2: "Header, 3-Pin"
Q1 Q2 Q3 Q4 Q5 Q6 Q7 Q8 Q9 Q10 Q11 Q12 Q13 Q14: library part NUD3105, "Relay Driver 5V Supply"
R1 R2 R12 R14 R16 R17 R18 R19 R21 R22 R23 R24 R25 R27 R28 R29 R30 R31 R32 R33 R34 R35 R36 R37 R38 R39 R40 R41 R42 R43 R49 R50 R51 R52 R53 R54 R55 R56 R61 R62 R66 R68 R69 R75 R76 R100 R101 R102 R103 R104 R105 R130 R131: library part Res1, "Resistor"
U1: library part STM32F103RBT6, "STM32 ARM-based 32-bit MCU with 128 Kbytes Flash, 64-pin LQFP, Industrial Temperature"
U4: library part AD8676
U9 U19: library part AD8422
U12: "Ultralow Noise, XFET Voltage References"
U14: library part AD5687R
USB: library part USB_Normal, "USB interface"

## Free pads (board coordinates)
  round 60 hole 30: 2(9652.86,5819.02)

## Via types
v1: diameter 30/30 (per signal layer), hole 14, Component Side to Solder Side, 849 vias
v2: diameter 50, hole 28, Component Side to Solder Side, 63 vias
v3: diameter 30, hole 14, Component Side to Solder Side, 27 vias
v4: diameter 39.37, hole 29.53, Component Side to Solder Side, 2 vias
v5: diameter 66.93, hole 47.24, Component Side to Solder Side, 2 vias

## Nets (pads, with @x,y where several pads share a name; then routed paths per layer and width w, separated by ;. In a path a pad name is that pad's centre, name@x,y a point inside that pad or via, vN(x,y) a via of type N, cw(c..) or ccw(c..) an arc to the next point about the centre after c; other vN are vias at no path point)
1.25V: U13.6 U13.7 U17.9 U18.9 | length 1676.4
  Component Side w10: U17.9@11269.09,6156.31 11318.82,6156.31 v1@11348.83,6186.32 ; U18.9@11269.09,7084.7 11320.74,7084.7 v1@11348.92,7112.89 ; v1@11384.16,5752.12 U13.7@11453.06,5752.12 U13.6@11453.06,5702.98
  Solder Side w10: 11349.85,5918.63 11382.96,5885.51 v1@11382.96,5754.15
  Solder Side w20: 11349.85,5918.63 v1@11349.85,7115.14
  other v1: 11383.9,5750.75 11350.1,6187.26 11351.19,7115.15
2.5V: C82.1 C83.1 R22.1 R61.1 U10.1 U10.2 U11.1 U11.2 U13.1 U13.2 | length 5329.8
  Component Side w10: v1@10686.34,7860.77 R22.1@10829.65,7860.77 ; v1(10689.86,7408.52) v1@12102.88,7408.52 ; U13.2@11236.52,5752.94 U13.1@11236.52,5802.52 R61.1@11236.52,5868.88 ; v1@12099.39,7408.97 12179.21,7408.97 12262.43,7325.75 C83.1@12262.43,7208.6 ; v1@12100.46,6323.43 12226.52,6323.43 12258.6,6291.35 U10.2@12258.6,6110.3 ; U11.2@12262.02,7066.13 U11.1@12262.02,7085.81 C83.1@12262.02,7219.29
  Component Side w20: R61.1@11236.27,5873 11236.27,5949.21 11267.53,5980.47 v1@12100.65,5980.47
  Solder Side w10: v1@10689.5,7405.12 v1(10689.5,7862.85)
  Solder Side w20: v1@12100.06,5983 v1@12100.06,7408.97
  other v1: 12099.73,5980.78 12099.76,6322.32 12100.14,7410.47
5V: C9.2 C10.1 C13.2 C15.1 C17.1 C60.1 C61.1 C62.2 C93.1 C94.2 C120.2 C156.1 L2.1 PWR_5V.3 U12.2 U13.8 U14.5 U17.8 U18.8 | length 22108.2
  Component Side w10: U12.2@11240.98,5410.57 U12.2@11243.88,5407.67 ; U18.8@11267.71,7063.89 U18.8@11268.84,7065.01 ; U17.8@11269.09,6136.62 11419.93,6136.62 C120.2@11439.12,6155.82 ; U18.8@11269.09,7065.01 C13.2@11434.64,7065.01 ; C13.2@11437.31,7071 11437.31,7196.9 11463.67,7223.26 v1@11543.61,7223.26 ; C120.2@11438.61,6157.07 11438.61,6296.25 11465.82,6323.46 v1@11539.29,6323.46 ; U13.8@11453.06,5802.52 C94.2@11542.63,5802.52 ; v1(11542.26,5865.09) 11542.26,5807.55 11544.56,5805.25 11545.61,5806.3 C94.2@11545.26,5806.64 ; U14.5@11987.2,7786.7 12055.02,7786.7 12097.01,7744.71 C10.1@12097.01,7551.82
  Component Side w20: v2@10901.66,5413.66 U12.2@11242.39,5413.66 ; v2@11976.03,7549.26 C10.1@12100.19,7549.26
  Component Side w50: v2@10902.05,10665.22 12951.05,10665.22 13303.99,11018.16 C61.1@13303.99,11754.2 ; PWR_5V.3@12786.52,11751.73 C61.1@13277.32,11751.73 ; C61.1@13282.28,11746.73 C61.1@13286.74,11742.27
  Component Side w80: v2@13370.33,9583.76 13681.88,9272.2 L2.1@13681.88,9240.31
  Solder Side w20: v2(10900.39,5410.78) v2@10900.39,10663.49
  Solder Side w30: v1@11543.2,5867.54 v1(11543.2,7222.81) 11543.2,10659.49 v2@11544.4,10660.69 ; v2(11978.02,7547.79) 11978.02,9454.02 11977.57,9454.47 12090.52,9567.42 v2@12090.52,10664.87
  Solder Side w40: v2(13681.88,9265.31) v2@13686.88,9260.31
  Solder Side w100: PWR_5V.3@12785.58,11752.26 12785.58,10168.59 v2@13682.88,9266.3
  other v1: 11542.91,6324.41
  other v2: 13628.41,9320.31 13566.88,9383.59 13506.88,9445.31 13440.52,9513.57 13373.78,9580.31 11543.51,10666.17 12091.26,10666.36 10900.29,10667.44
+15V: C19.2 C37.2 C38.1 C39.2 C40.1 C43.2 C44.1 C97.1 C100.1 C103.2 C104.1 C110.2 C111.1 C114.2 C115.1 C150.2 C151.1 D1.2 D3.1 K1.1 K2.1 K3.1 K4.1 K5.1 K6.1 K7.1 K8.1 K9.1 K10.1 K11.2 K12.2 K13.2 K14.2 pad.2 R130.2 U2.5 U4.8 U6.8 U7.8 U9.8 U15.3 U19.8 U23.8 | length 27955.4
  Component Side w10: v1@7507.49,8472.74 U6.8@7507.49,8698.92 ; v1@7508.5,7436.32 U7.8@7508.5,7655.66 ; v1@8449.23,7845.61 C115.1@8518.18,7845.61 ; v1(8452.56,8782.01) C111.1@8513.5,8782.01 ; U9.8@8516.63,8643.45 C110.2@8516.63,8696.92 ; C110.2@8516.69,8694.68 C111.1@8516.69,8774.16 ; C114.2@8518.18,7760.4 C115.1@8518.18,7845.61 ; U19.8@8518.72,7703.91 C114.2@8518.72,7757.4 ; C115.1@8537.38,7845.61 C115.1@8518.18,7845.61 ; 9711.82,9118.09 9715.55,9118.09
  Component Side w20: K1.1@9715.55,8989.96 9715.55,9118.09 C38.1@9715.55,9171.61 ; v2@10218.25,9519.78 U4.8@10580.65,9519.78 ; U23.8@11279.24,7982.31 C151.1@11459.97,7981.91
  Component Side w30: K14.2@7912.65,9757.88 7912.65,9840.59 7956.35,9884.3 v2@8450.22,9884.3 ; v2@9655.35,6519.15 K8.1@9715.55,6519.15 ; v2@9658.34,7931.04 K4.1@9715.55,7931.04 ; v2@9661.38,8284.01 K3.1@9715.55,8284.01 ; pad.2@9662.01,5813.21 K10.1@9715.55,5813.21 ; v2@9662.19,8636.98 K2.1@9715.55,8636.98 ; v2@9662.55,8989.96 K1.1@9715.55,8989.96 ; v2@9662.63,7578.07 K5.1@9715.55,7578.07 ; v2@9663,7225.1 K6.1@9715.55,7225.1 ; v2@9663.99,6872.13 K7.1@9715.55,6872.13 ; v2@9666.86,6166.18 K9.1@9715.55,6166.18 ; v2(10213.9,9095.85) 10571.53,9095.85 10572.12,9096.44 ; K13.2@10668.09,9192.41 10572.43,9096.75 v2@11621.08,9096.75 ; U2.5@11978.92,9782.7 C104.1@12214.45,9782.7 ; C104.1@12214.76,9805.3 v2(12214.76,9900.87)
  Component Side w40: D1.2@10161.84,11324.4 D3.1@10298.04,11324.4 ; D3.1@10300.63,11324.13 R130.2@10300.63,11431.73 ; C151.1@11459.97,7981.91 v1(11459.97,8106.8)
  Component Side w50: v2@8452.74,10525.56 v2(9653.04,10525.56) ; v2@9652.06,10527.42 v2(10214.65,10527.42) v2@12217.69,10527.42 ; v2@10215.11,10531.16 10215.11,11318.72
  Solder Side w10: v2@10213.02,10529.82 v2@10213.02,10533.35 ; v1@11459.62,8107.15 v1(11459.97,8106.8)
  Solder Side w20: v1@7507.3,7429.32 7572.32,7494.34 7572.32,9186.14 7756.88,9370.7 7756.88,10383.84 7898.45,10525.41 v2@8451.74,10525.41 ; v1(7507.97,8467.85) 7570.47,8467.85
  Solder Side w30: v1@8451.74,7848.25 v2@8451.74,10525.41 ; pad.2@9652.86,5819.02 v2@9652.86,10531.52 ; v2@11618.39,9096.24 11618.39,6699.92 K12.2@11720.86,6597.45 ; 11622.67,7483.89 K11.2@11716.76,7483.89 ; v2@12214.99,9899.57 v2(12214.99,10526.29)
  Solder Side w40: v2@10213.06,9091.71 v2@10213.06,10533.38 ; v1@11459.62,8107.15 v1@11459.62,10525.23
  other v1: 7509.48,7429.46 8450.79,7847.06 11459.88,10525.51
  other v2: 9654.62,6167.39 9650.76,6520.28 9655.15,6879.09 9652.82,7224.5 9653.64,7578.46 9652.82,7932.76 9652.82,8285.14 9655.15,8636.37 9651.66,8987.59 11616.67,9094.32 10212.94,9523.95 8452.62,9887.25 8454.68,10525.53
+24V: C66.1 C67.1 C68.1 D3.2 PWR_24V.3 R130.1 U15.1 | length 1229.6
  Component Side w40: PWR_24V.3@9927.23,11769.48 PWR_24V.3@9928.53,11768.18
  Component Side w50: PWR_24V.3@9928.53,11768.18 C68.1@10412.99,11768.18 ; U15.1@10412.06,11016.75 C68.1@10412.06,11760.01
-5V: C14.2 C16.2 C18.2 C54.2 C55.2 C56.2 C95.2 C121.2 PWR_5V.1 U13.4 U17.3 U18.3 | length 9252.7
  Component Side w10: C18.2@10788.44,6151.73 10978.47,6151.73 10993.57,6136.62 U17.3@11076.17,6136.62 ; C16.2@10839.08,7065.01 U18.3@11076.17,7065.01 ; C95.2@11152.6,5651.33 U13.4@11236.52,5651.33
  Component Side w20: v3@10594.98,6157.52 C18.2@10772.31,6157.52 ; v3@10597.26,5759.48 11096.47,5759.48 11149.35,5706.6 C95.2@11149.35,5651.24 ; v3@10598.3,7066.91 C16.2@10828.75,7066.91
  Component Side w50: v2@10594.32,10816.21 11521.25,10816.21 11852.62,11147.58 11852.62,11751.73 C56.2@12177.82,11751.73 PWR_5V.1@12392.82,11751.73
  Solder Side w30: v3@10594.66,5759.83 v3(10594.66,6159.41) v2@10594.66,10820.52
  other v2: 10596.98,10819.16
  other v3: 10594.56,5761.66 10595.5,7067.79
-15V: C41.2 C42.2 C45.2 C46.2 C99.2 C101.2 C102.2 C105.2 C106.2 C112.2 C113.2 C116.2 C117.2 C152.2 C153.2 D2.1 D4.2 R27.1 R131.2 U2.3 U4.4 U6.4 U7.4 U9.5 U16.3 U19.5 U23.4 | length 15661.8
  Component Side w10: U6.4@7697.49,8775.72 v1@7697.49,8997.83 ; U7.4@7698.5,7732.46 v1@7698.5,7967.11 ; v1(8361.17,8344.7) C113.2@8510.63,8344.7 ; v1@8363.46,7410.2 C117.2@8518.75,7410.2 ; C113.2@8516.49,8348 C112.2@8516.49,8435.76 ; C112.2@8516.63,8440.37 U9.5@8516.63,8492.27 ; C117.2@8518.72,7412.21 U19.5@8518.72,7552.73 ; R27.1@11705.95,9544.63 R27.1@11710.03,9540.55 ; R27.1@11709.72,9543.84 11787.84,9543.84 11844.64,9600.64 U2.3@11844.64,9785.65
  Component Side w20: C153.2@11062.71,7652.73 U23.4@11062.71,7831.13 ; U2.3@11845.06,9782.7 U2.3@11847.63,9785.27
  Component Side w30: U4.4@10797.18,9677.4 v2@10797.18,9943.3 ; C153.2@11074.02,7652.65 11077.5,7649.16 v1(11210.92,7649.16) ; v2@11352.65,9790.77 11596.45,9790.77 11674.55,9868.88 11812.85,9868.88 11845.06,9836.67 U2.3@11845.06,9782.7
  Component Side w40: v2@7820.49,10150.36 v2(8920.12,10150.36) v2@11355.4,10150.36 ; D2.1@8798.46,11346.47 D4.2@8921.74,11346.47 ; D4.2@8920.05,11353.51 R131.2@8920.05,11461.48 ; U16.3@8922.53,11015.51 D4.2@8922.53,11329.05
  Component Side w50: v2@8922.53,10651.2 U16.3@8922.53,11015.51
  Solder Side w20: 7640.92,9001.38 v1(7697.11,9001.38) ; v1(7699.82,7969.33) 7637.39,8031.76 7637.39,9175.8 7818.85,9357.26 v2@7818.85,10152.96
  Solder Side w30: v1@8361.52,7409.62 v2@8361.52,10148.55 ; v2(10797.03,9944.8) v2@10797.03,10147.75
  Solder Side w40: v2@8921.22,10149.01 v2@8924.24,10145.99 ; v1@11207.99,7649.8 v2(11207.99,10147.78) ; v2@11352.96,9790.27 v2@11352.96,10147.89
  Solder Side w50: v2@8921.22,10149.01 v2(8921.22,10654.92)
  other v1: 8362.27,7410.86
  other v2: 11354.77,9789.48 7822.81,10149.3 8361.32,10148.87 10795.2,10148.8 11353.49,10149
-24V: C50.1 C51.2 C52.2 D4.1 PWR_24V.1 R131.1 U16.2 | length 1205.7
  Component Side w40: U16.2@9027.12,11013.64 9027.12,11761.91 C52.2@9029.64,11764.43 ; C52.2@9034.69,11764.48 C50.1@9323.53,11764.48 PWR_24V.1@9488.53,11764.48
ADC1_CNV: U1.38 U10.6 | length 1502.4
  Component Side w10: U10.6@12417.28,6046.61 13483.44,6046.61 13639.4,6202.57 U1.38@13639.4,6418.24
ADC1_SCK: U1.36 U10.8 | length 1418.3
  Component Side w10: U10.8@12413.91,6086.26 13429.6,6086.26 13600.03,6256.69 U1.36@13600.03,6418.24
ADC1_SDI: U1.35 U10.9 | length 1379.5
  Component Side w10: U10.9@12415.88,6105.86 13413.58,6105.86 13580.34,6272.62 U1.35@13580.34,6418.24 ; U10.9@12427.91,6106.09 U10.9@12428.13,6105.86
ADC1_SDO: U1.37 U10.7 | length 1462.2
  Component Side w10: U10.7@12415.6,6066.35 13459.55,6066.35 13619.71,6226.51 U1.37@13619.71,6418.24
ADC2_CNV: U1.23 U11.6 | length 1246.3
  Component Side w10: U11.6@12434.24,7006.8 12546.08,7006.8 12594.56,6958.32 12594.56,6839.93 12768.22,6666.27 U1.23@13470.11,6666.27
ADC2_SCK: U1.21 U11.8 | length 1265.3
  Component Side w10: U11.8@12419.97,7046.14 12582.11,7046.14 12644.86,6983.39 12644.86,6856.91 12796.13,6705.64 U1.21@13470.11,6705.64
ADC2_SDI: U1.20 U11.9 | length 1266
  Component Side w10: U11.9@12421.61,7065.74 12597.81,7065.74 12671.13,6992.42 12671.13,6861.85 12807.66,6725.33 U1.20@13470.11,6725.33
ADC2_SDO: U1.22 U11.7 | length 1258.5
  Component Side w10: U11.7@12423.29,7026.36 12561.51,7026.36 12619.58,6968.29 12619.58,6847.66 12781.29,6685.96 U1.22@13470.11,6685.96
AGND: C9.1 C10.2 C13.1 C14.1 C15.2 C16.1 C17.2 C18.1 C19.1 C21.2 C31.1 C32.2 C33.1 C35.2 C37.1 C38.2 C39.1 C40.2 C41.1 C42.1 C43.1 C44.2 C45.1 C46.1 C47.2 C48.2 C49.2 C50.2 C51.1 C52.1 C54.1 C55.1 C56.1 C60.2 C61.2 C62.1 C66.2 C67.2 C68.2 C80.2 C82.2 C83.2 C84.1 C90.1 C93.2 C94.1 C95.1 C97.2 C99.1 C100.2 C101.1 C102.1 C103.1 C104.2 C105.1 C106.1 C110.1 C111.2 C112.1 C113.1 C114.1 C115.2 C116.1 C117.1 C120.1 C121.1 C150.1 C151.2 C152.1 C153.1 C156.2 D1.1 D2.2 DL.5 FORCE_L.1 FORCE_L.2 GUARD.2 K11.6 K12.6 K14.1 L3.1 PWR_5V.2 PWR_24V.2 Q1.2 Q2.2 Q3.2 Q4.2 Q5.2 Q6.2 Q7.2 Q8.2 Q9.2 Q10.2 Q11.2 Q12.2 Q13.2 Q14.2 R23.1 R62.2 R75.2 SENSE_L.2 T5.1 U9.6 U10.4 U10.5 U11.4 U11.5 U12.4 U14.4 U14.9 U14.16 U15.2 U16.1 U17.1 U17.2 U18.1 U18.2 U19.6 U23.5 | length 1618.1
  Component Side w10: FORCE_L.1@7295.38,5772.23 R75.2@7295.38,6324.21 ; 9659.47,11707.46 PWR_24V.2@9722.05,11770.04 9789.51,11837.49 ; U17.2@11076.17,6156.31 11115.19,6156.31 ; U18.2@11076.17,7084.7 11115.29,7084.7 ; 11797.51,7812.12 C48.2@11838.5,7812.12 ; U14.4@11987.2,7811.9 v1@12087.01,7811.9 ; 12167.82,7727.43 12184.14,7711.11 U14.9@12221.05,7711.11 12284.26,7711.11 ; 12527.88,11811.66 12652.32,11687.22
  Solder Side w10: 9659.47,11832.62 PWR_24V.2@9722.05,11770.04 9739.58,11770.04 9802.37,11707.25 ; 12522.82,11696.73 12642.47,11816.39
  other v1: 10633.03,4924.64 10713.03,4924.64 10793.03,4924.64 9119.58,4937.76 9199.58,4937.76 9279.58,4937.76 7640.7,4979.93 7720.7,4979.93 7800.7,4979.93 7640.7,5059.93 7720.7,5059.93 7800.7,5059.93 11280.66,5147.96 11360.66,5147.96 11440.66,5147.96 8083.71,5222.19 8204.85,5222.61 7944.46,5225.97 7729.37,5227.71 7809.37,5227.71 11280.66,5227.96 11360.66,5227.96 11440.66,5227.96 9513.32,5235.77 9593.32,5235.77 9673.32,5235.77 12253.2,5249.04 8760.21,5250.71 8844.7,5250.56 12113.94,5252.82 10653.55,5278.12 10733.55,5278.12 8083.71,5302.19 8204.85,5302.61 7944.46,5305.97 7729.37,5307.71 7809.37,5307.71 9513.32,5315.77 9593.32,5315.77 9673.32,5315.77 12253.2,5329.04 8760.21,5330.71 8844.7,5330.56 12113.94,5332.82 10653.55,5358.12 10733.55,5358.12 10292.95,5367.01 7204.06,5373.16 7284.06,5373.16 7364.06,5373.16 8083.71,5382.19 8204.85,5382.61 7944.46,5385.97 7729.37,5387.71 7809.37,5387.71 12253.2,5409.04 8760.21,5410.71 8844.7,5410.56 12113.94,5412.82 10293.06,5431.54 10653.55,5438.12 10733.55,5438.12 7204.06,5453.16 7284.06,5453.16 7364.06,5453.16 11392.9,5507.18 10293.06,5511.54 11089.15,5561.72 11169.15,5561.72 11249.15,5561.72 11392.9,5587.18 10293.06,5591.54 12122.11,5630.79 9862.68,5685.74 9942.68,5685.74 12122.11,5710.79 10352.27,5758.09 10432.27,5758.09 9860.3,5767.35 9940.3,5767.35 11743.88,5769.58 11823.88,5769.58 12122.11,5790.79 10352.27,5838.09 10432.27,5838.09 11743.88,5849.58 11823.88,5849.58 11084.74,5880.5 11164.74,5880.5 12220.76,5898.53 12300.76,5898.53 10352.27,5918.09 10432.27,5918.09 11084.74,5960.5 11164.74,5960.5 12220.76,5978.53 12300.76,5978.53 9844.47,6109.95 9924.47,6109.95 11864.31,6144.6 11944.31,6144.6 12024.31,6144.6 9812.43,6173.32 9892.43,6173.32 10296.05,6193.34 10376.05,6193.34 10456.05,6193.34 8234.43,6196.24 8314.43,6196.24 8394.43,6196.24 11076.86,6243.91 11209.33,6246.05 11289.33,6246.05 7195.26,6268.67 10296.05,6273.34 10376.05,6273.34 10456.05,6273.34 10670.27,6292.64 10750.27,6292.64 11076.86,6323.91 11209.33,6326.05 11289.33,6326.05 7195.26,6348.67 11626.86,6392.64 12189.37,6407.88 12269.37,6407.88 7195.26,6428.67 9850.85,6441.38 9930.85,6441.38 11626.86,6472.64 12189.37,6487.88 12269.37,6487.88 10667.45,6510.87 10747.45,6510.87 9848.79,6513.08 9928.79,6513.08 10295.97,6514.94 10375.97,6514.94 10455.97,6514.94 11102.83,6549.9 11182.83,6549.9 11262.83,6549.9 11626.86,6552.64 8616.68,6568.65 8696.68,6568.65 10667.45,6590.87 10747.45,6590.87 10295.97,6594.94 10375.97,6594.94 10455.97,6594.94 8250.75,6604.33 8330.75,6604.33 8410.75,6604.33 11102.83,6629.9 11182.83,6629.9 11262.83,6629.9 8616.68,6648.65 8696.68,6648.65 8616.68,6728.65 8696.68,6728.65 9851.08,6792.01 9931.08,6792.01 8616.68,6808.65 8696.68,6808.65 12136.04,6830.76 12216.04,6830.76 9815.85,6867.65 9895.85,6867.65 8616.68,6888.65 8696.68,6888.65 11177.92,6898.62 11257.92,6898.62 12136.04,6910.76 12216.04,6910.76 8256.22,6961.34 8116.96,6965.12 8616.68,6968.65 8696.68,6968.65 10308.49,6977.19 10388.49,6977.19 11177.92,6978.62 11257.92,6978.62 12192.3,6994.29 8256.22,7041.34 8116.96,7045.12 10308.49,7057.19 10388.49,7057.19 12003.52,7112.07 8256.22,7121.34 8116.96,7125.12 12301.89,7135.71 10308.49,7137.19 10388.49,7137.19 9838.42,7154.71 9918.42,7154.71 11084.11,7163.24 11208.74,7192.07 11288.74,7192.07 12003.52,7192.07 11021.09,7209.93 9801.71,7234.61 9881.71,7234.61 7208.77,7269.55 7348.03,7269.99 12003.52,7272.07 7208.77,7349.55 7348.03,7349.99 12003.52,7352.07 10274.25,7412.81 10354.25,7412.81 10434.25,7412.81 7208.77,7429.55 7348.03,7429.99 11135.19,7474.63 11215.19,7474.63 11295.19,7474.63 10274.25,7492.81 10354.25,7492.81 10434.25,7492.81 9850.7,7513.37 9930.7,7513.37 11687.5,7596.3 11767.5,7596.3 11847.5,7596.3 12282.99,7625.3 11375.08,7648.29 12282.94,7681.84 10286.43,7710.22 11375.08,7728.29 10521.64,7781.02 10286.43,7790.22 11375.08,7808.29 12083.42,7811.72 11144.9,7854.86 9851.42,7861.04 9931.42,7861.04 10521.64,7861.02 10286.43,7870.22 10521.64,7941.02 11146.04,7947.14 11685.63,7997.04 11765.63,7997.04 11845.63,7997.04 10399.04,8006.63 12159.82,8065.81 12239.82,8065.81 10734.81,8074.25 10399.04,8086.63 12159.82,8145.81 12239.82,8145.81 7788.47,8146.57 7713.41,8148.99 10734.81,8154.25 10399.04,8166.63 11299.45,8170.38 11379.45,8170.38 9859.68,8215.68 9939.68,8215.68 7788.47,8226.57 7713.41,8228.99 11332.79,8245.62 9814.52,8283.48 9894.52,8283.48 7788.47,8306.57 7713.41,8308.99 9830.4,8528.69 9910.4,8528.69 11745.9,8535.89 11825.9,8535.89 11355.42,8584.6 9830.4,8608.69 9910.4,8608.69 11745.9,8615.89 11825.9,8615.89 11355.42,8664.6 11355.42,8744.6 11756.8,8906.57 11836.8,8906.57 9851.42,8928.82 9924.07,8928.82 11355.36,8942.64 11756.8,8986.57 11836.8,8986.57 11355.36,9022.64 11756.8,9066.57 11836.8,9066.57 12140.5,9078.01 12220.5,9078.01 9373.27,9124.47 9885.68,9128.32 9965.68,9128.32 12140.5,9158.01 12220.5,9158.01 9373.27,9204.47 9885.68,9208.32 9965.68,9208.32 9885.68,9288.32 9965.68,9288.32 11610.95,9435.01 11610.95,9515.01 11610.95,9595.01 9350.58,9786.81 9430.58,9786.81 9510.58,9786.81 9926.81,9804.01 10011.31,9803.87 12686.6,9807.38 12547.35,9811.16 13465.87,9832.2 7364.03,9883.99 9926.81,9884.01 10011.31,9883.87 7212.47,9885.9 12686.6,9887.38 12547.35,9891.16 13465.87,9912.2 9354.37,9926.07 9434.37,9926.07 9514.37,9926.07 7364.03,9963.99 7212.47,9965.9 12686.6,9967.38 12547.35,9971.16 14276.88,9990.31 14356.88,9990.31 14436.88,9990.31 7364.03,10043.99 7212.47,10045.9 13254.94,10060.13 14276.88,10070.31 14356.88,10070.31 14436.88,10070.31 13254.94,10140.13 15458.97,10461.71 15538.97,10461.71 12430.13,10485.46 12510.13,10485.46 12590.13,10485.46 15458.97,10541.71 15538.97,10541.71 12430.13,10565.46 12510.13,10565.46 12590.13,10565.46 10339.16,10610.5 10419.16,10610.5 15458.97,10621.71 15538.97,10621.71 13581.88,10635.31 13661.88,10635.31 10339.16,10690.5 10419.16,10690.5 14261.46,10702.8 14341.46,10702.8 14421.46,10702.8 13581.88,10715.31 13661.88,10715.31 9621.89,10768.75 10339.16,10770.5 10419.16,10770.5 9482.63,10772.53 14261.46,10782.8 14341.46,10782.8 14421.46,10782.8 9621.89,10848.75 10339.16,10850.5 10419.16,10850.5 9482.63,10852.53 8386.95,10857.01 8466.95,10857.01 8546.95,10857.01 14261.46,10862.8 14341.46,10862.8 14421.46,10862.8 9621.89,10928.75 9482.63,10932.53 8386.95,10937.01 8466.95,10937.01 8546.95,10937.01 13915.03,11008.01 13775.77,11011.8 8386.95,11017.01 8466.95,11017.01 8546.95,11017.01 7338.57,11027.61 7418.57,11027.61 13915.03,11088.01 13775.77,11091.8 12255.55,11100.39 12335.55,11100.39 12415.55,11100.39 12495.55,11100.39 7338.57,11107.61 7418.57,11107.61 12994.01,11131.42 13074.01,11131.42 13154.01,11131.42 13915.03,11168.01 13775.77,11171.8 12255.55,11180.39 12335.55,11180.39 12415.55,11180.39 12495.55,11180.39 11072.72,11180.82 11152.72,11180.82 11232.72,11180.82 8242.34,11188.43 8103.08,11192.21 12994.01,11211.42 13074.01,11211.42 13154.01,11211.42 9615.98,11236.33 9695.98,11236.33 9775.98,11236.33 15005.51,11254.49 15085.51,11254.49 15165.51,11254.49 15245.51,11254.49 11072.72,11260.82 11152.72,11260.82 11232.72,11260.82 8242.34,11268.43 8103.08,11272.21 12994.01,11291.42 13074.01,11291.42 13154.01,11291.42 9615.98,11316.33 9695.98,11316.33 9775.98,11316.33 15005.51,11334.49 15085.51,11334.49 15165.51,11334.49 15245.51,11334.49 11072.72,11340.82 11152.72,11340.82 11232.72,11340.82 8242.34,11348.43 8103.08,11352.21 7441.16,11375.19 7521.16,11375.19 9615.98,11396.33 9695.98,11396.33 9775.98,11396.33 15005.51,11414.49 15085.51,11414.49 15165.51,11414.49 15245.51,11414.49 7441.16,11455.19 7521.16,11455.19 12487.82,11506.73 12567.82,11506.73 12647.82,11506.73 7441.16,11535.19 7521.16,11535.19 12487.82,11586.73 12567.82,11586.73 12647.82,11586.73 9653.53,11629.48 9733.53,11629.48 9813.53,11629.48 11210.94,11680.83 11290.94,11680.83 11370.94,11680.83 8150.5,11683.78 8230.5,11683.78 8310.5,11683.78 11210.94,11760.83 11290.94,11760.83 11370.94,11760.83 8150.5,11763.78 8230.5,11763.78 8310.5,11763.78 14213.96,11902.57 14293.96,11902.57 14373.96,11902.57 14453.96,11902.57 7752.74,11903.76 7832.74,11903.76 7912.74,11903.76 7992.74,11903.76 14213.96,11982.57 14293.96,11982.57 14373.96,11982.57 14453.96,11982.57 7752.74,11983.76 7832.74,11983.76 7912.74,11983.76 7992.74,11983.76 14213.96,12062.57 14293.96,12062.57 14373.96,12062.57 14453.96,12062.57 7752.74,12063.76 7832.74,12063.76 7912.74,12063.76 7992.74,12063.76
CTRL1: Q1.1 U1.8 | length 5169.6
  Component Side w10: Q1.1@9925.34,8714.79 9925.34,8677.51 10204.17,8398.69 13186.87,8398.69 13698.45,7887.1 U1.8@13698.45,6855.25
CTRL2: Q2.1 U1.9 | length 4917.1
  Component Side w10: Q2.1@9968.09,8361.71 9996.11,8361.71 10006.82,8372.42 13140.66,8372.42 13678.77,7834.31 U1.9@13678.77,6855.25
CTRL3: Q3.1 U1.10 | length 5006.8
  Component Side w10: Q3.1@9949.39,8009.77 10027.01,8009.77 10358.97,8341.73 13101.08,8341.73 13659.08,7783.73 U1.10@13659.08,6855.25
CTRL4: Q4.1 U1.11 | length 5216.8
  Component Side w10: Q4.1@9962.68,7655.57 9994.65,7655.57 10017.06,7677.98 10017.06,7935.78 10395.6,8314.32 13054.12,8314.32 13639.4,7729.04 U1.11@13639.4,6855.25
CTRL5: Q5.1 U1.24 | length 3959.3
  Component Side w10: Q5.1@9952.28,7304.38 9952.28,7236.66 10064.93,7124.01 10064.93,6903.47 10118.18,6850.22 11970.93,6850.22 12174.57,6646.59 ; 12174.42,6646.59 12174.57,6646.59 ; U1.24@13470.11,6646.59 12174.57,6646.59
CTRL6: Q6.1 U1.25 | length 3682.6
  Component Side w10: Q6.1@9951.76,6945.97 9951.76,6891.19 10023.99,6818.97 11954.4,6818.97 12146.46,6626.9 U1.25@13470.11,6626.9
CTRL7: Q7.1 U1.26 | length 3672.3
  Component Side w10: Q7.1@9950.42,6596.92 9993.32,6596.92 10182.69,6786.29 11943.63,6786.29 12122.7,6607.22 U1.26@13470.11,6607.22